# Altium PCB Control_Board_Model_C.PcbDoc (part 1 of 8)
Units mil, origin at the board's own origin, x right, y up, seen from the top; angles counter-clockwise.
Board outline 3417.32 x 2110.24 mil, 6 copper layers (1-SIG-TOP, 2-GND, 3-PWR, 4-SIG-HOR, 5-SIG-VERT, 6-GND-BOT), stack 46.063 mil thick; 420 components, 340 nets, 1596 pads, 39 vias.
Unrouted connection lines stored in the file: 362.
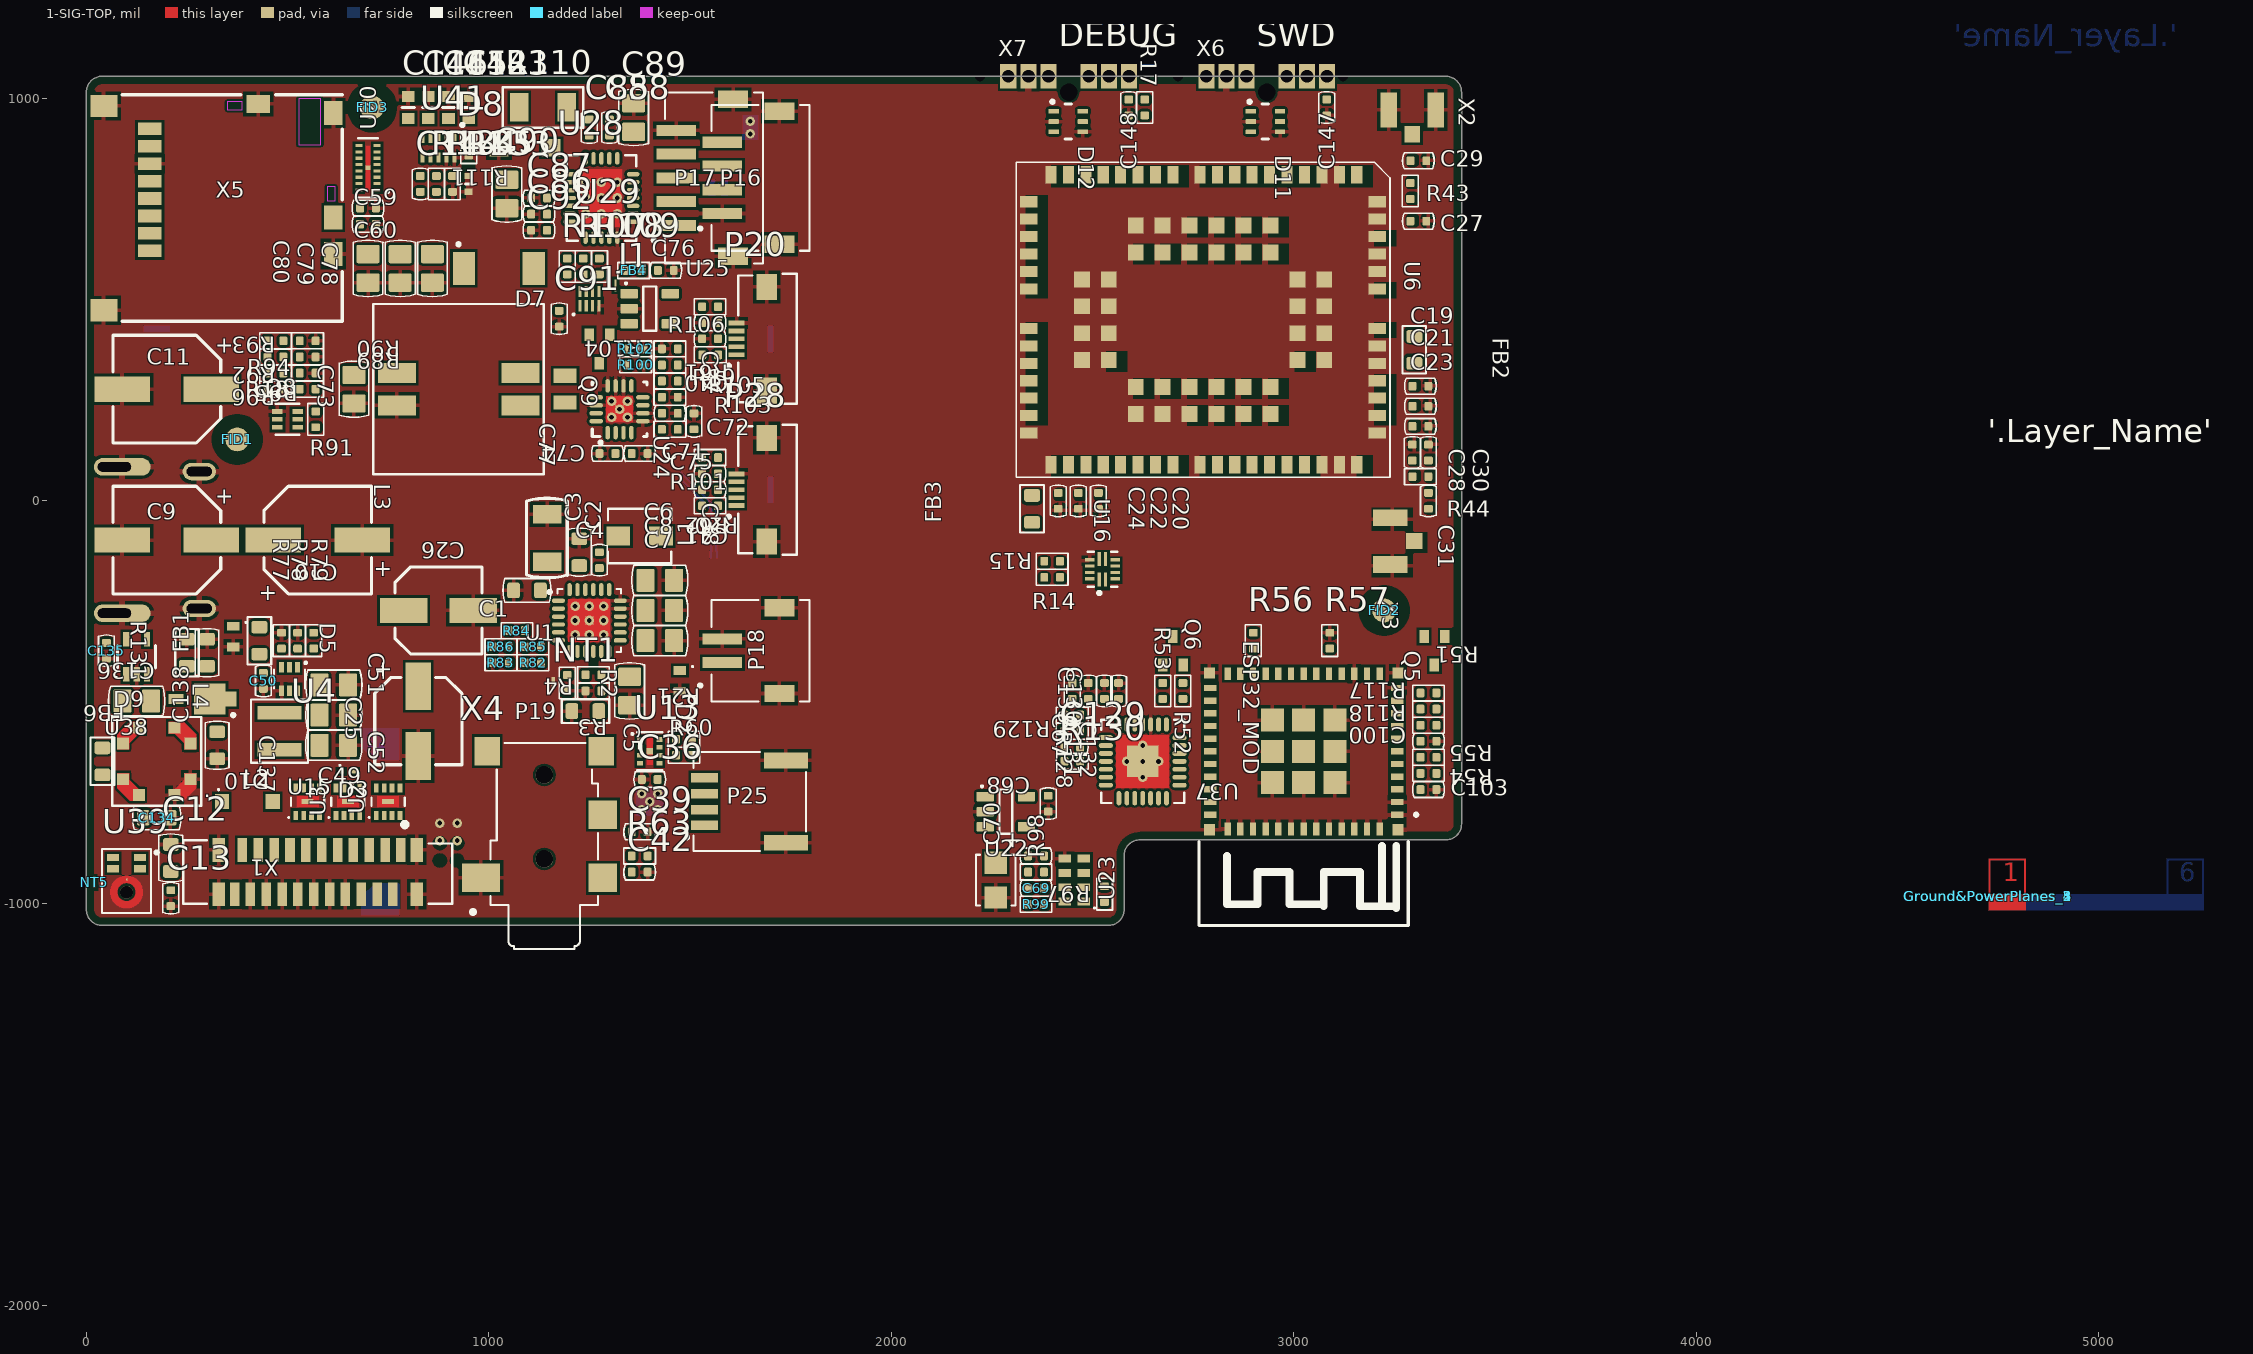
[diagram p0: 1-SIG-TOP view]
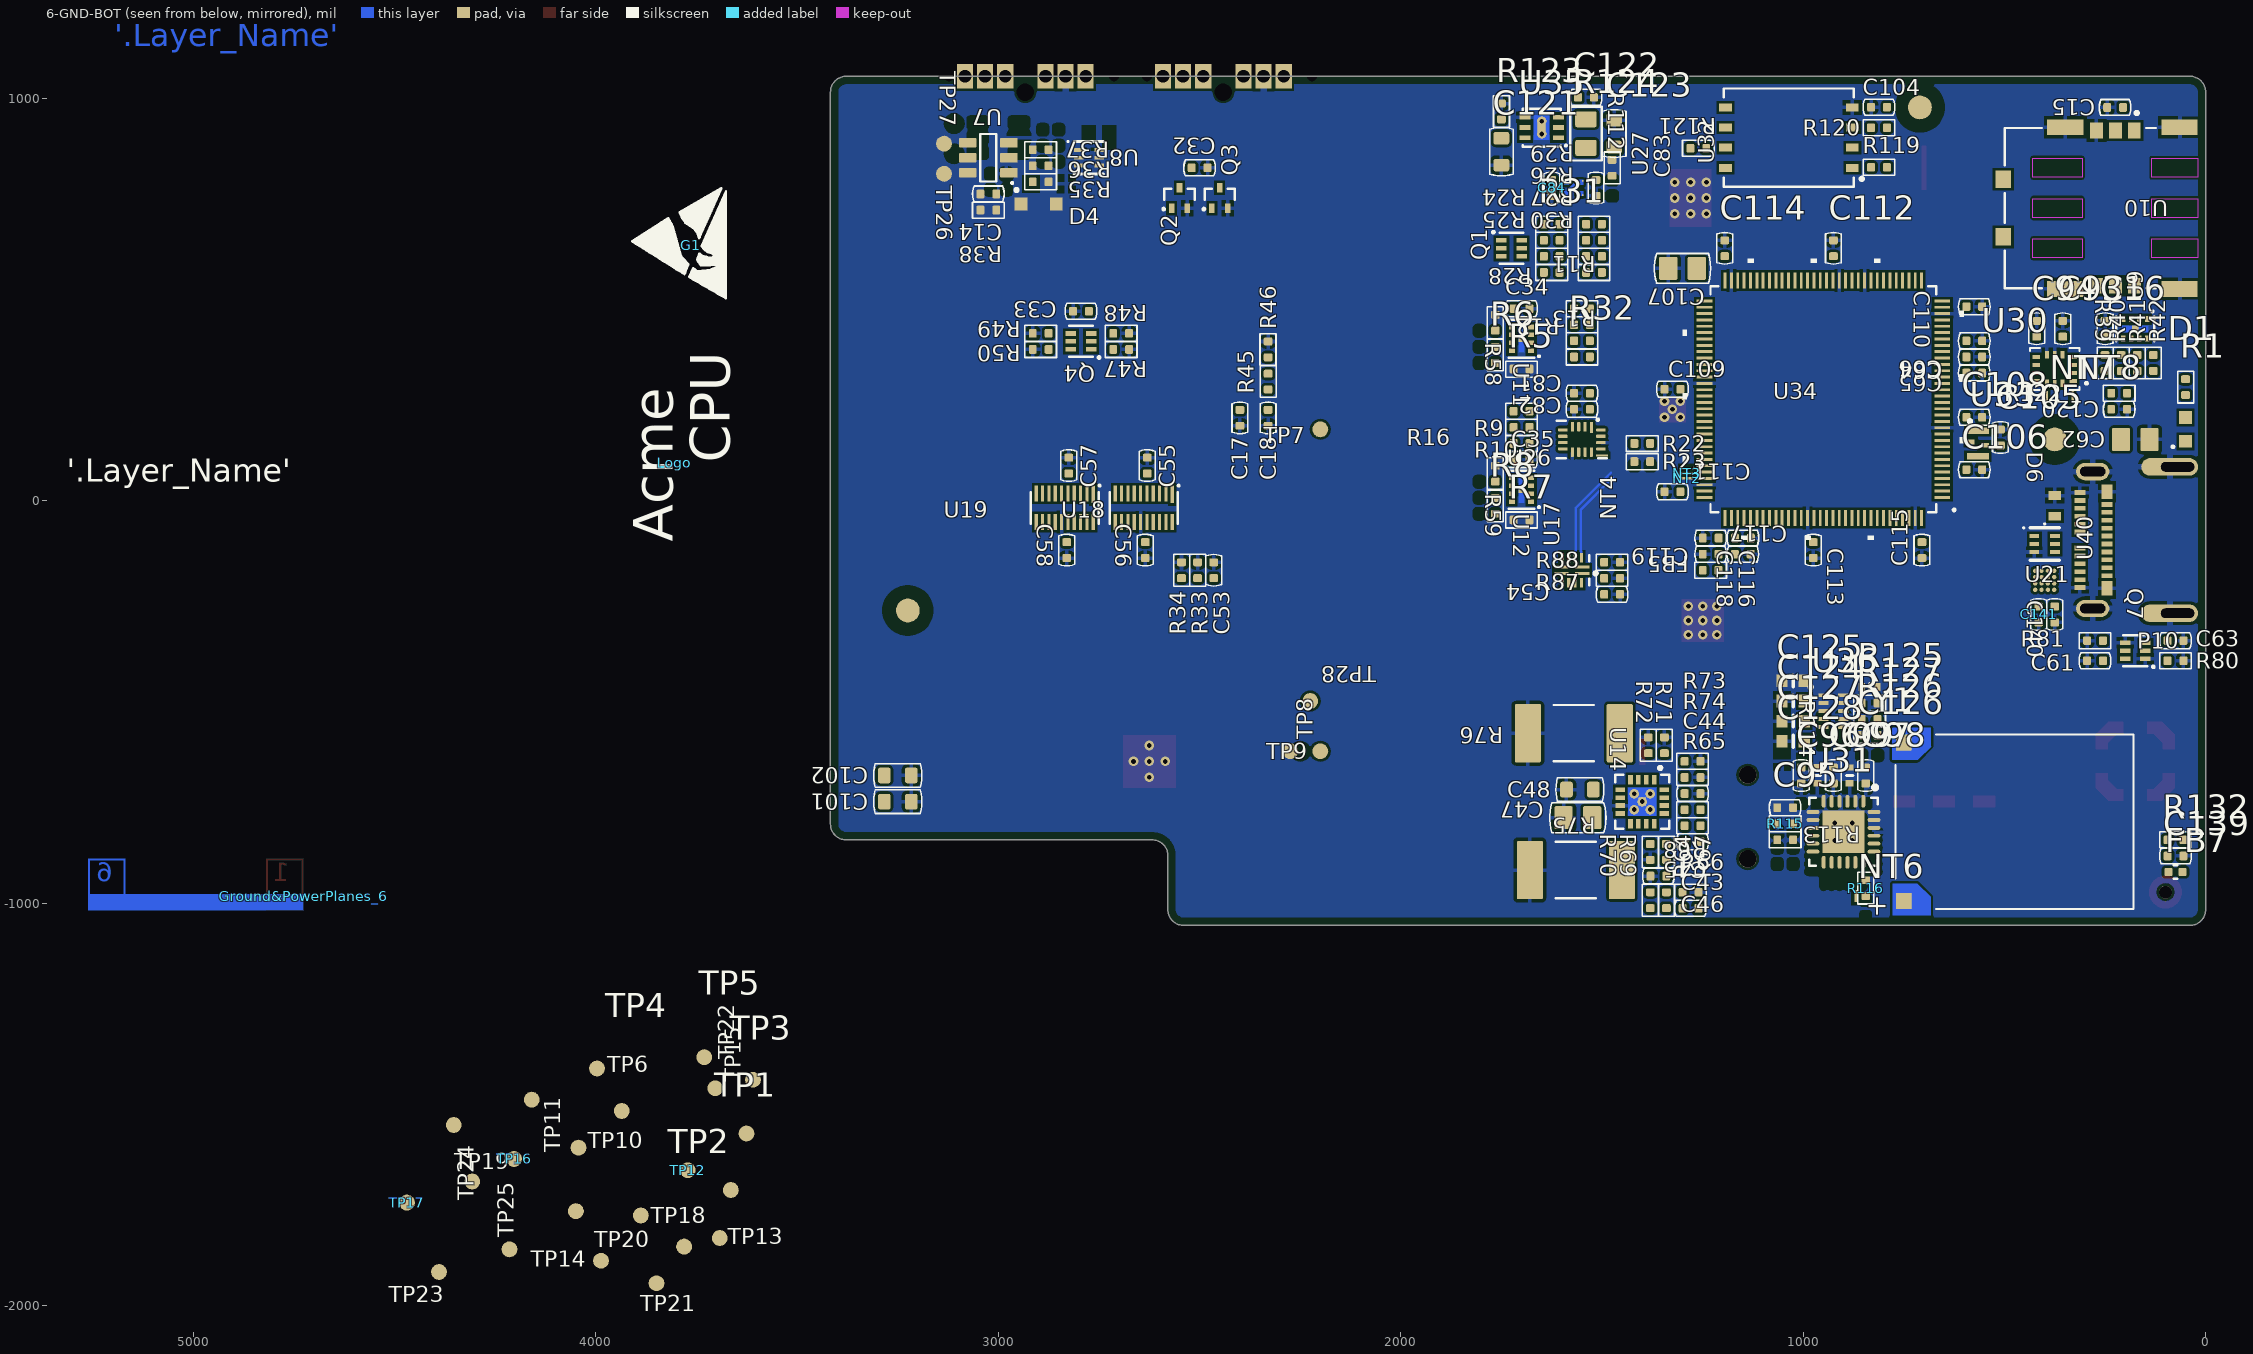
[diagram p1: 6-GND-BOT view, seen from below]
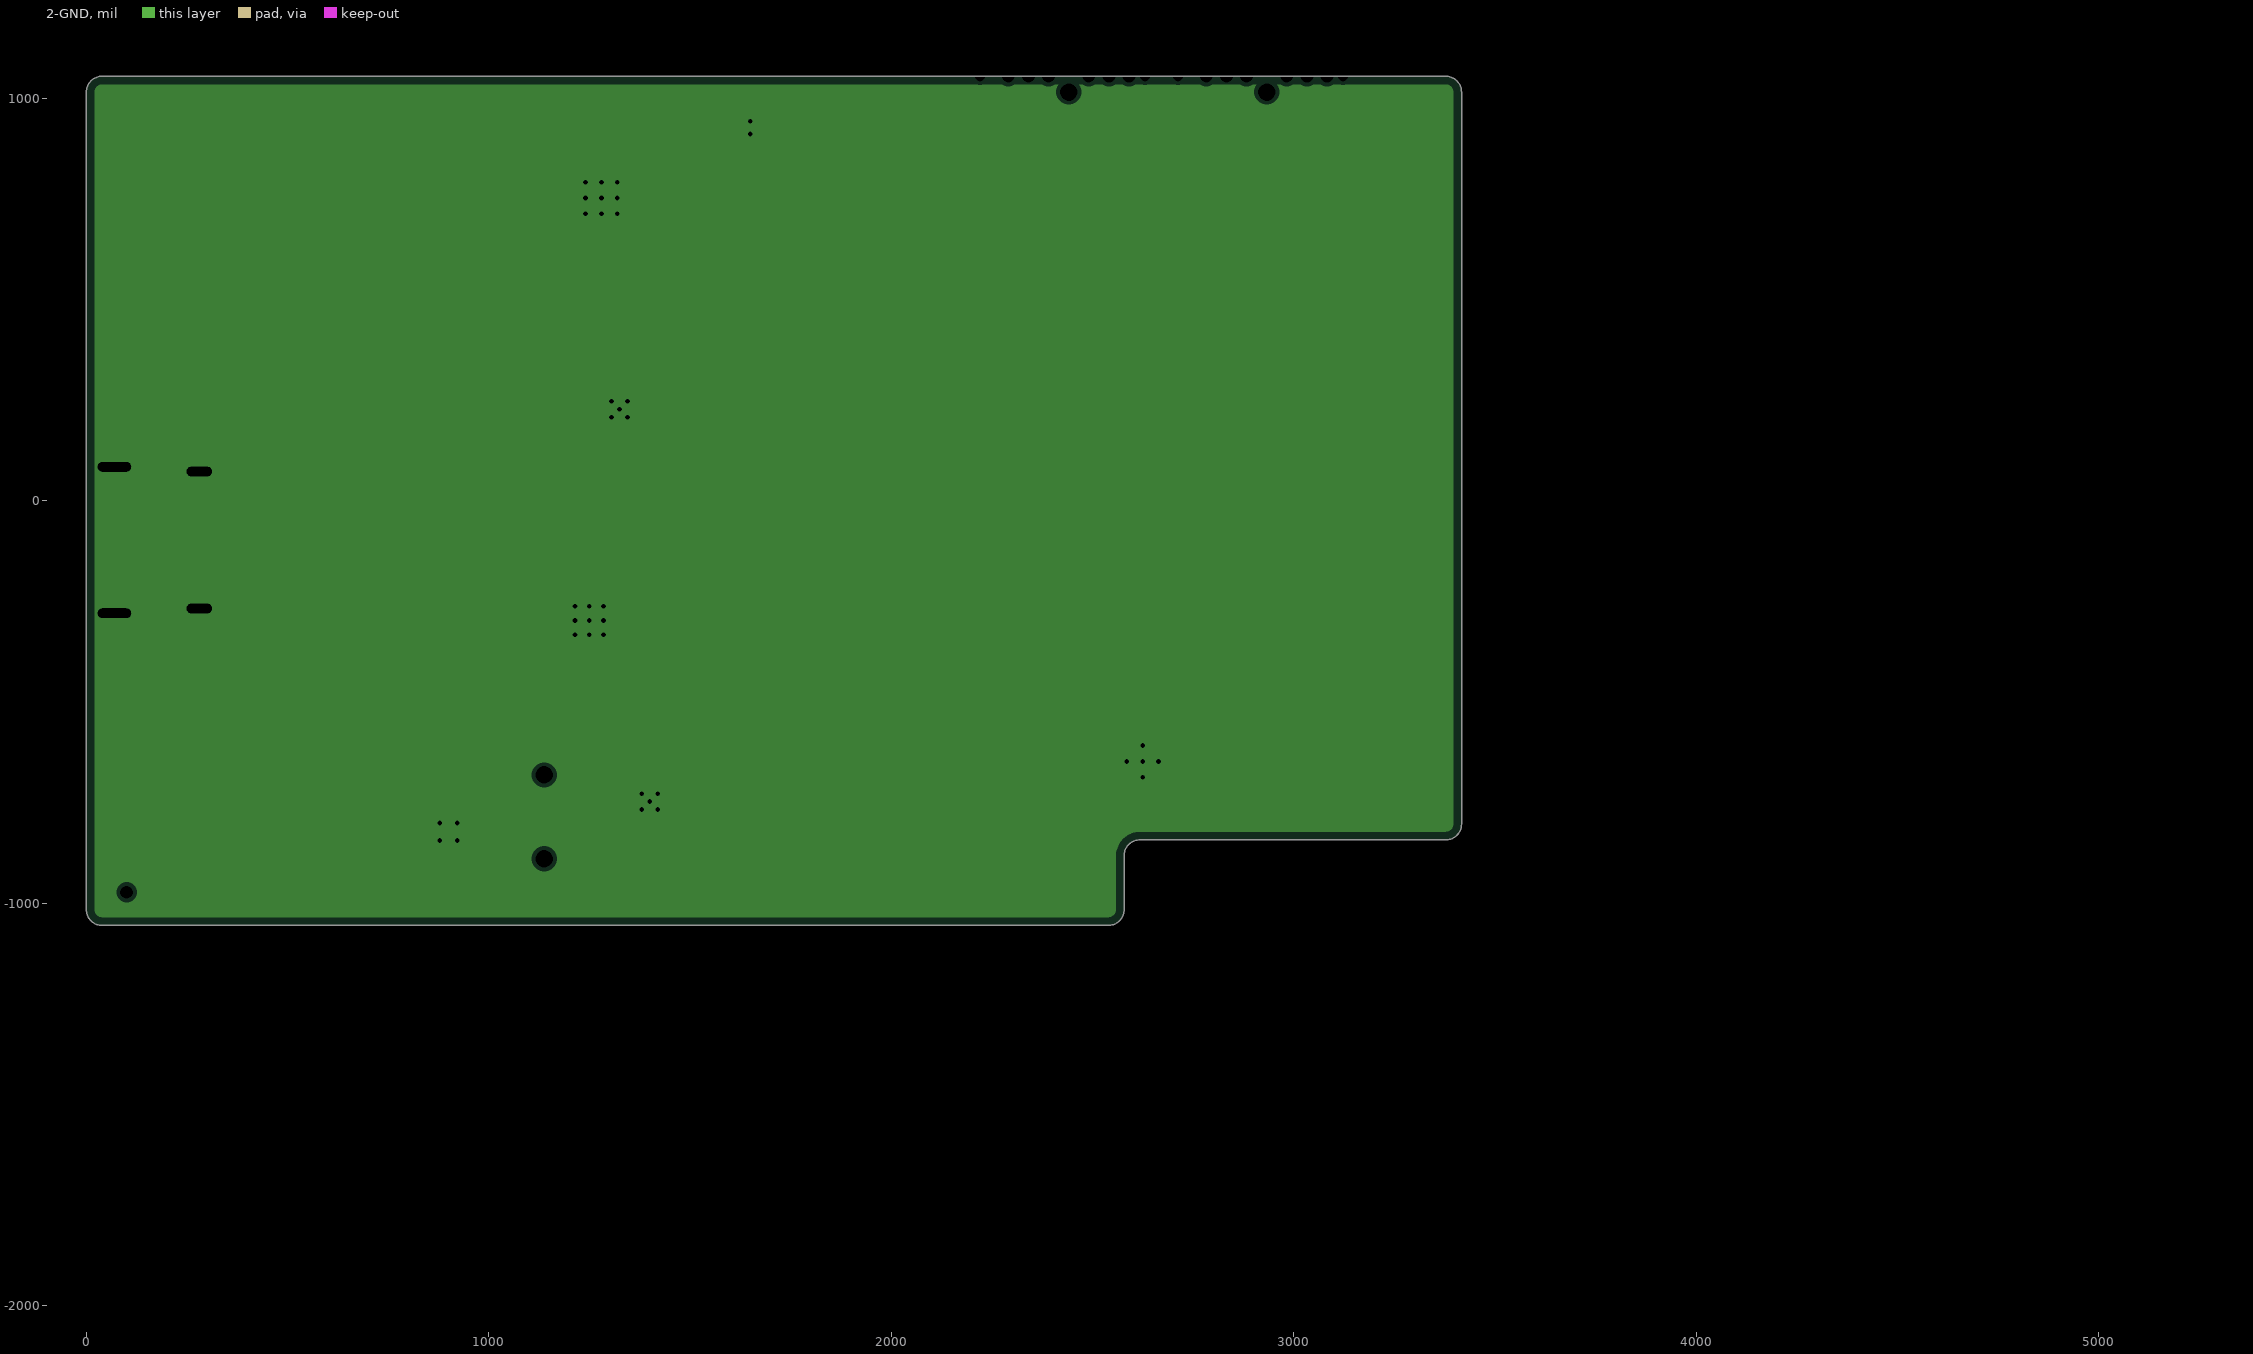
[diagram p2: 2-GND, clearances drawn from the general rule]
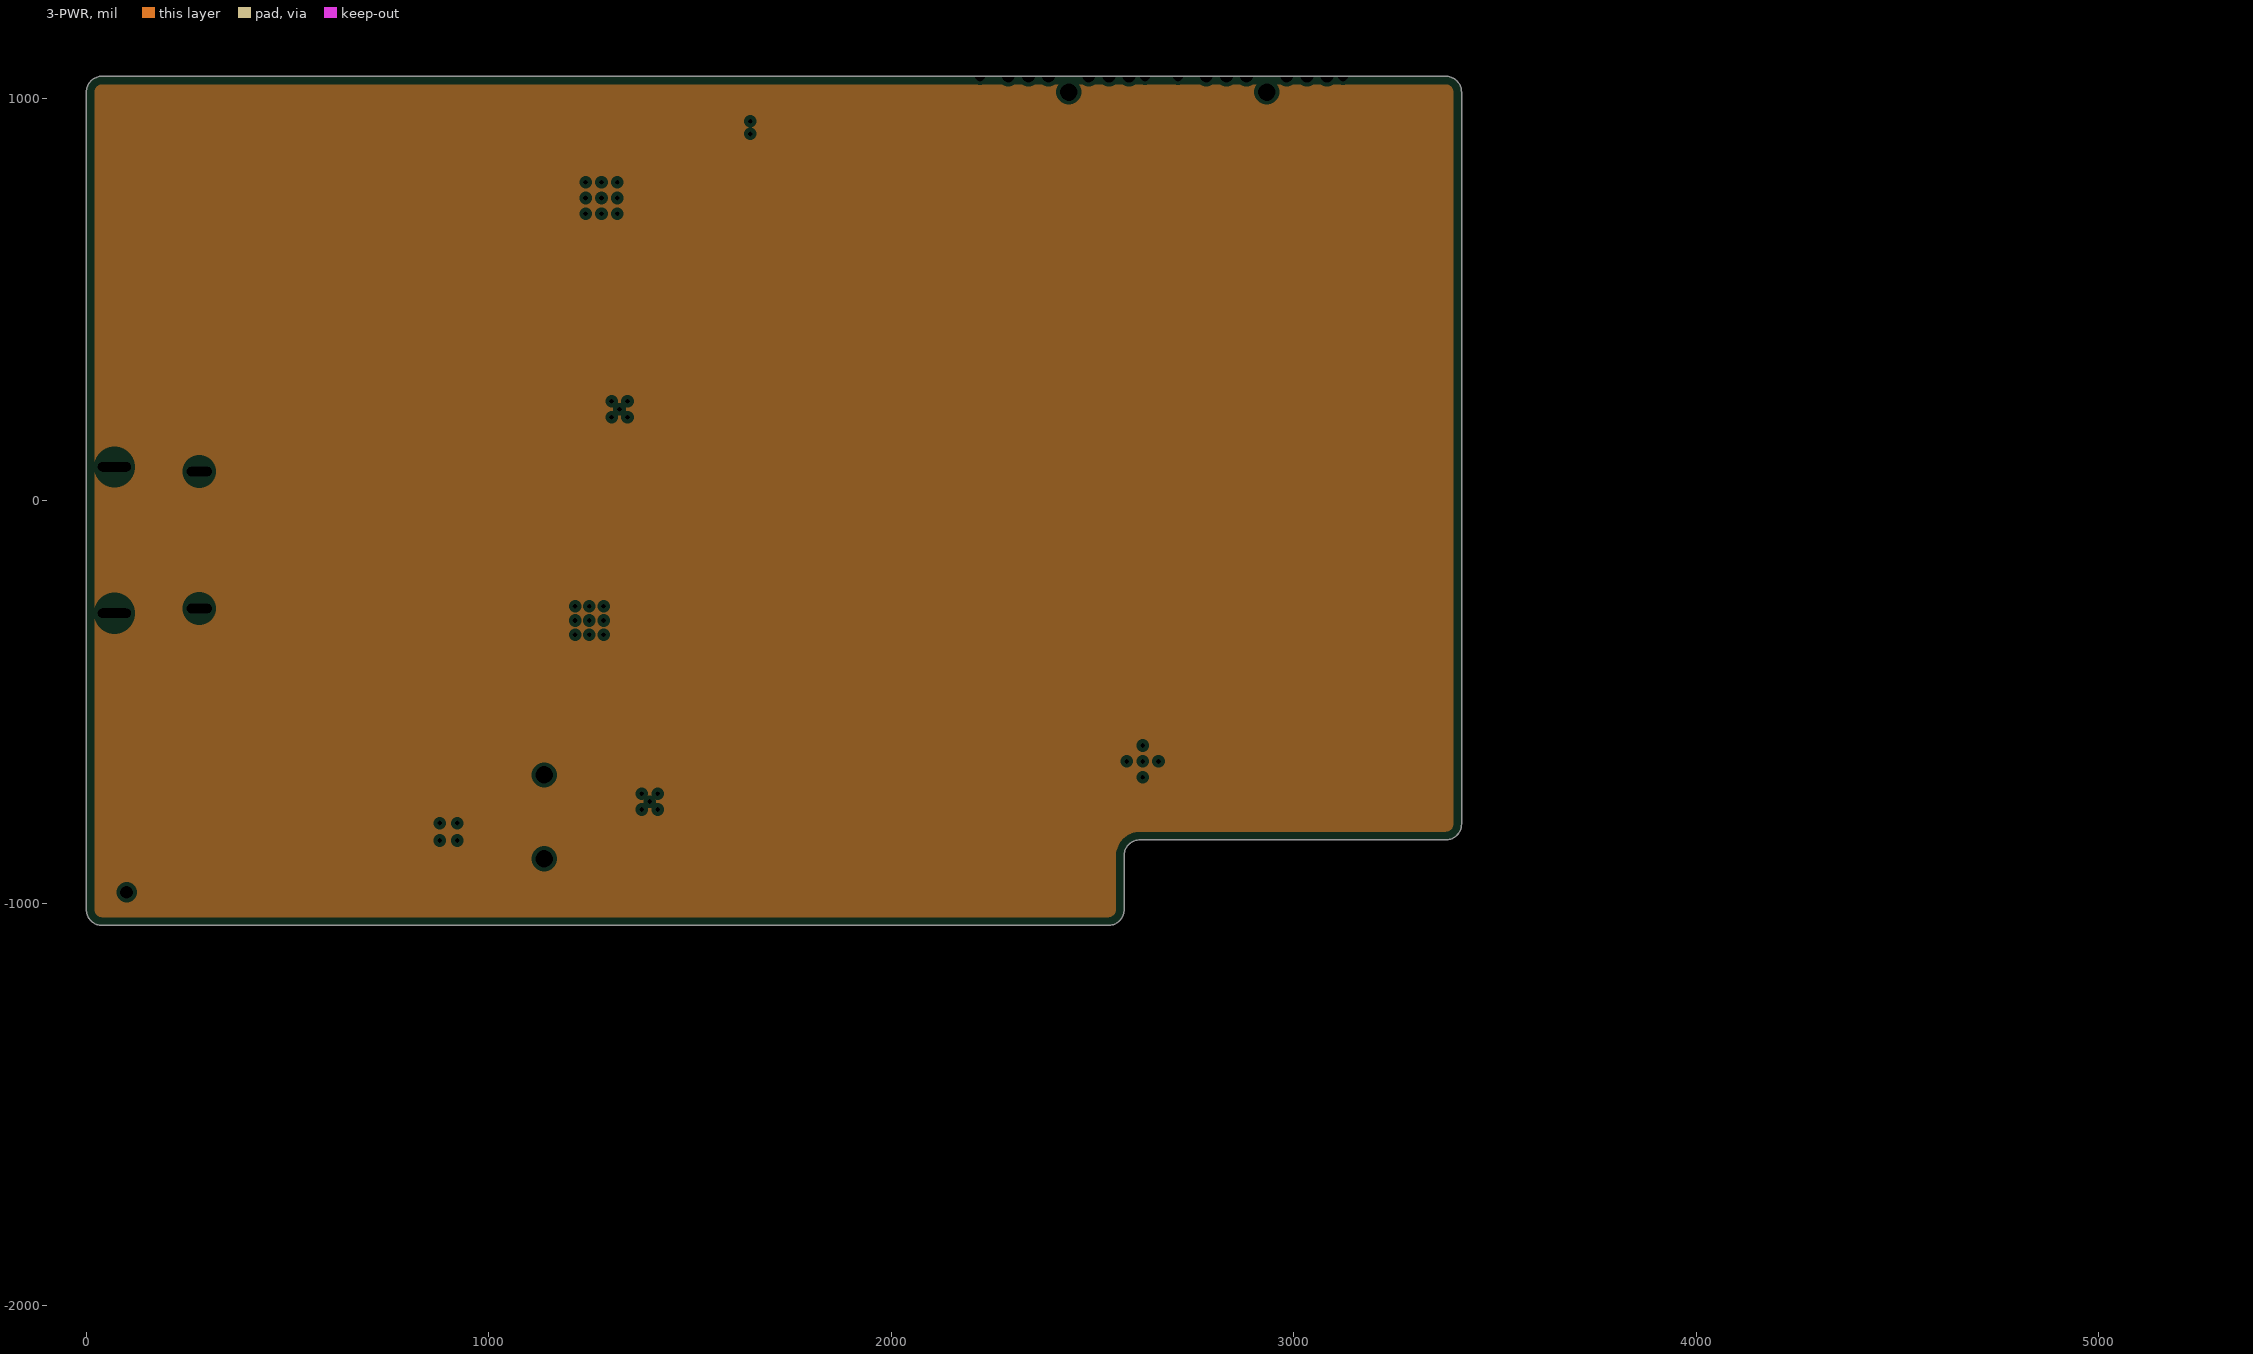
[diagram p3: 3-PWR, clearances drawn from the general rule]
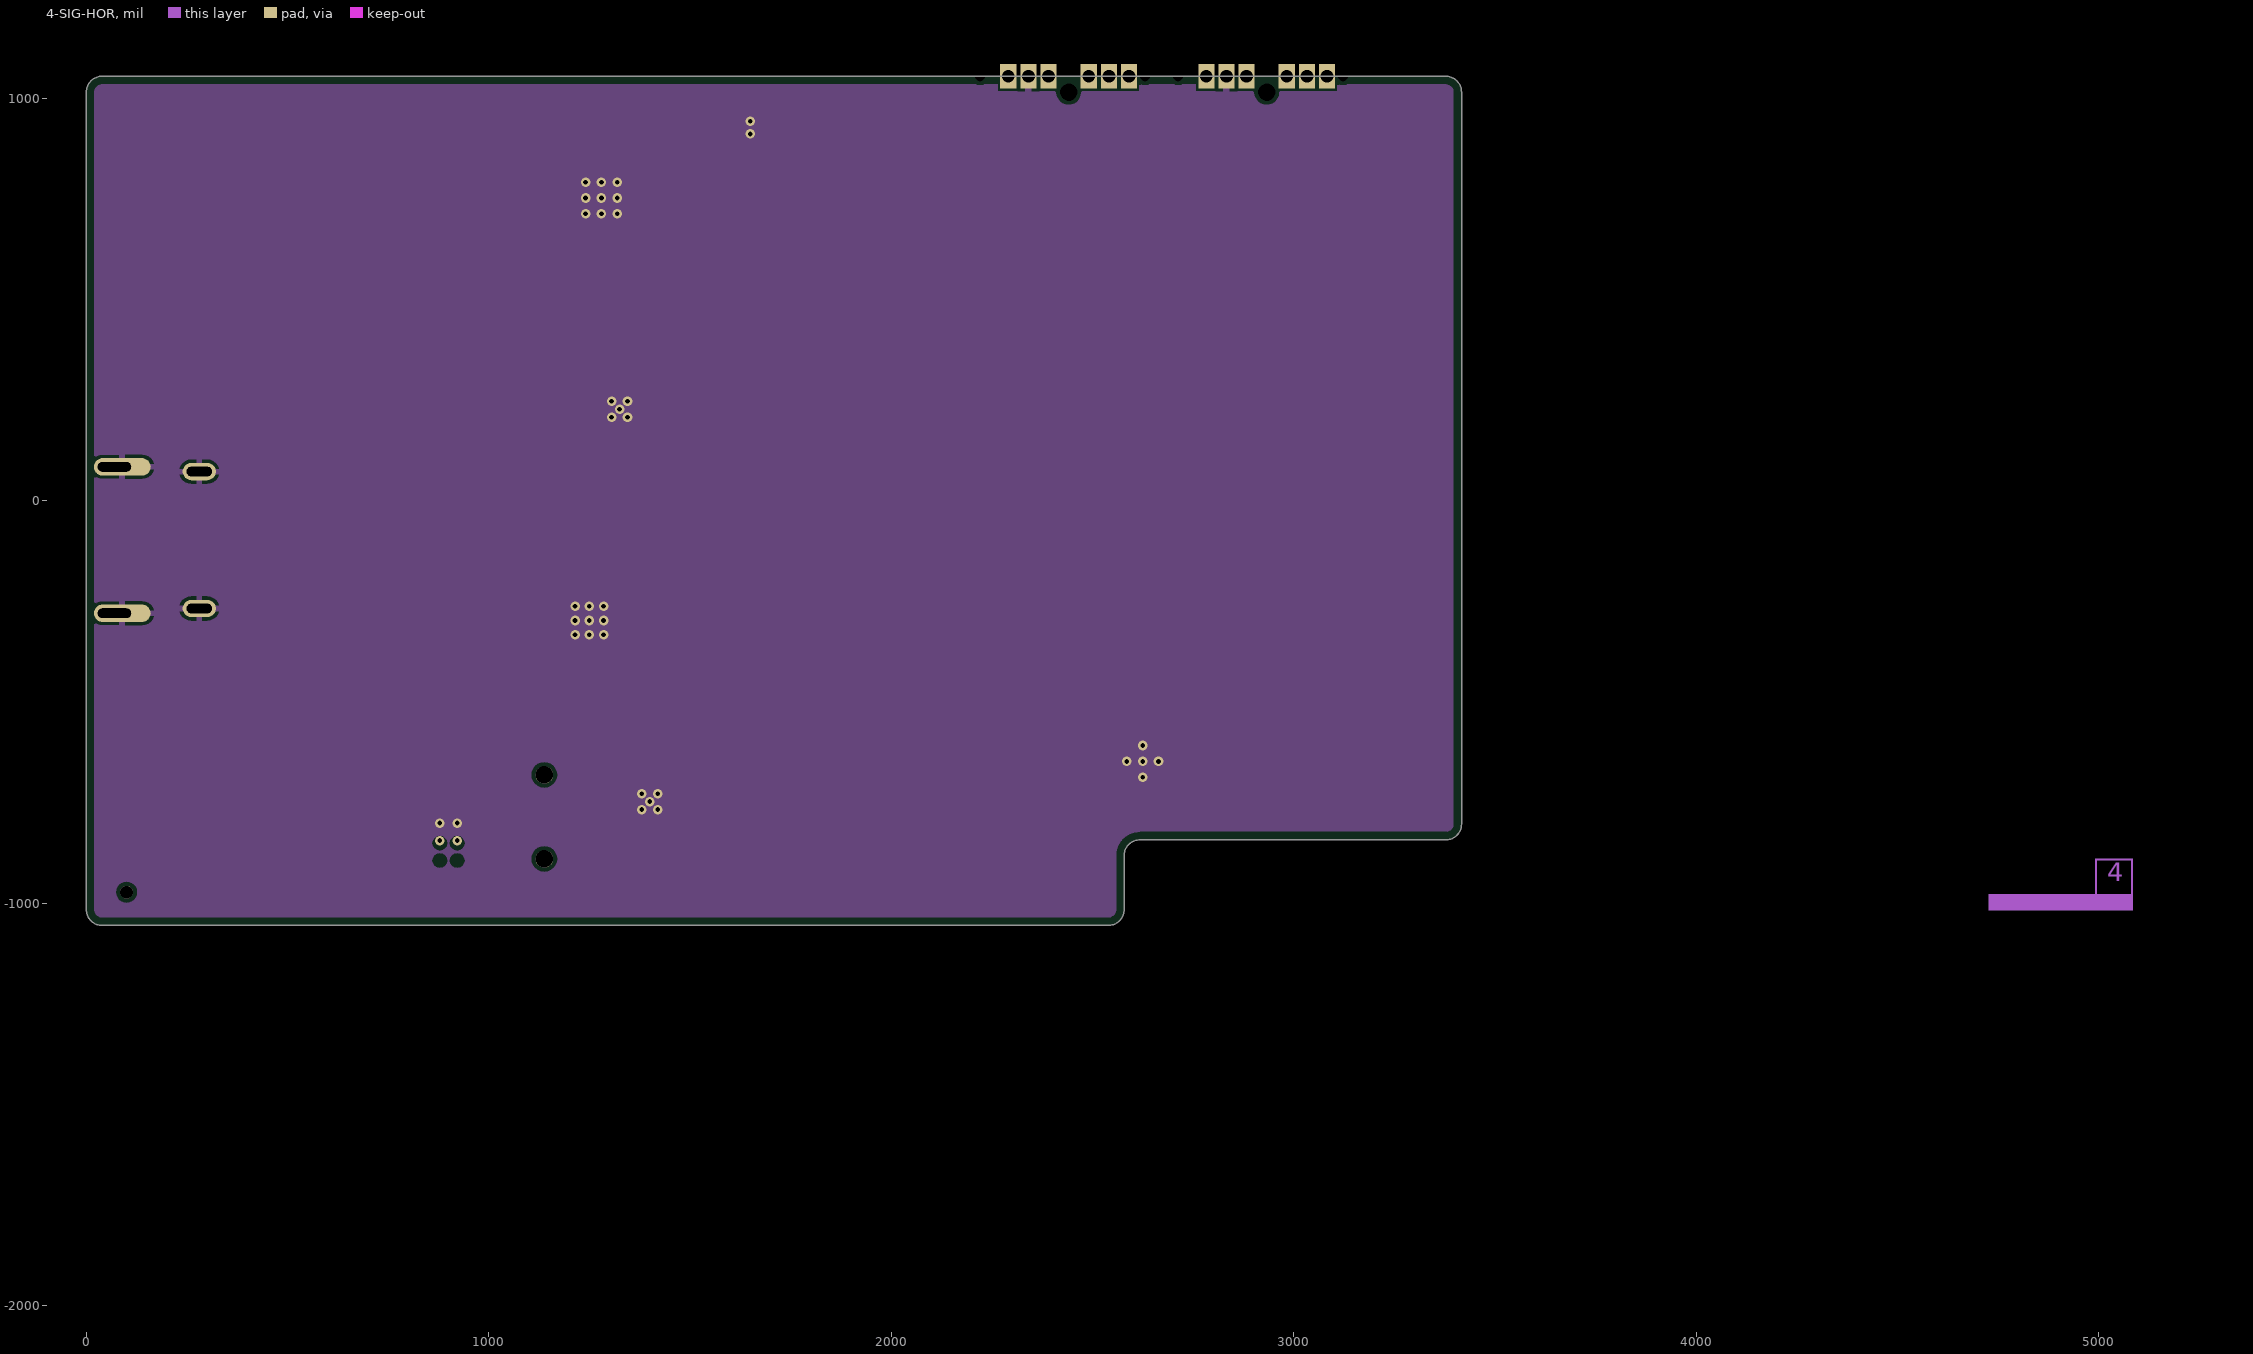
[diagram p4: 4-SIG-HOR]
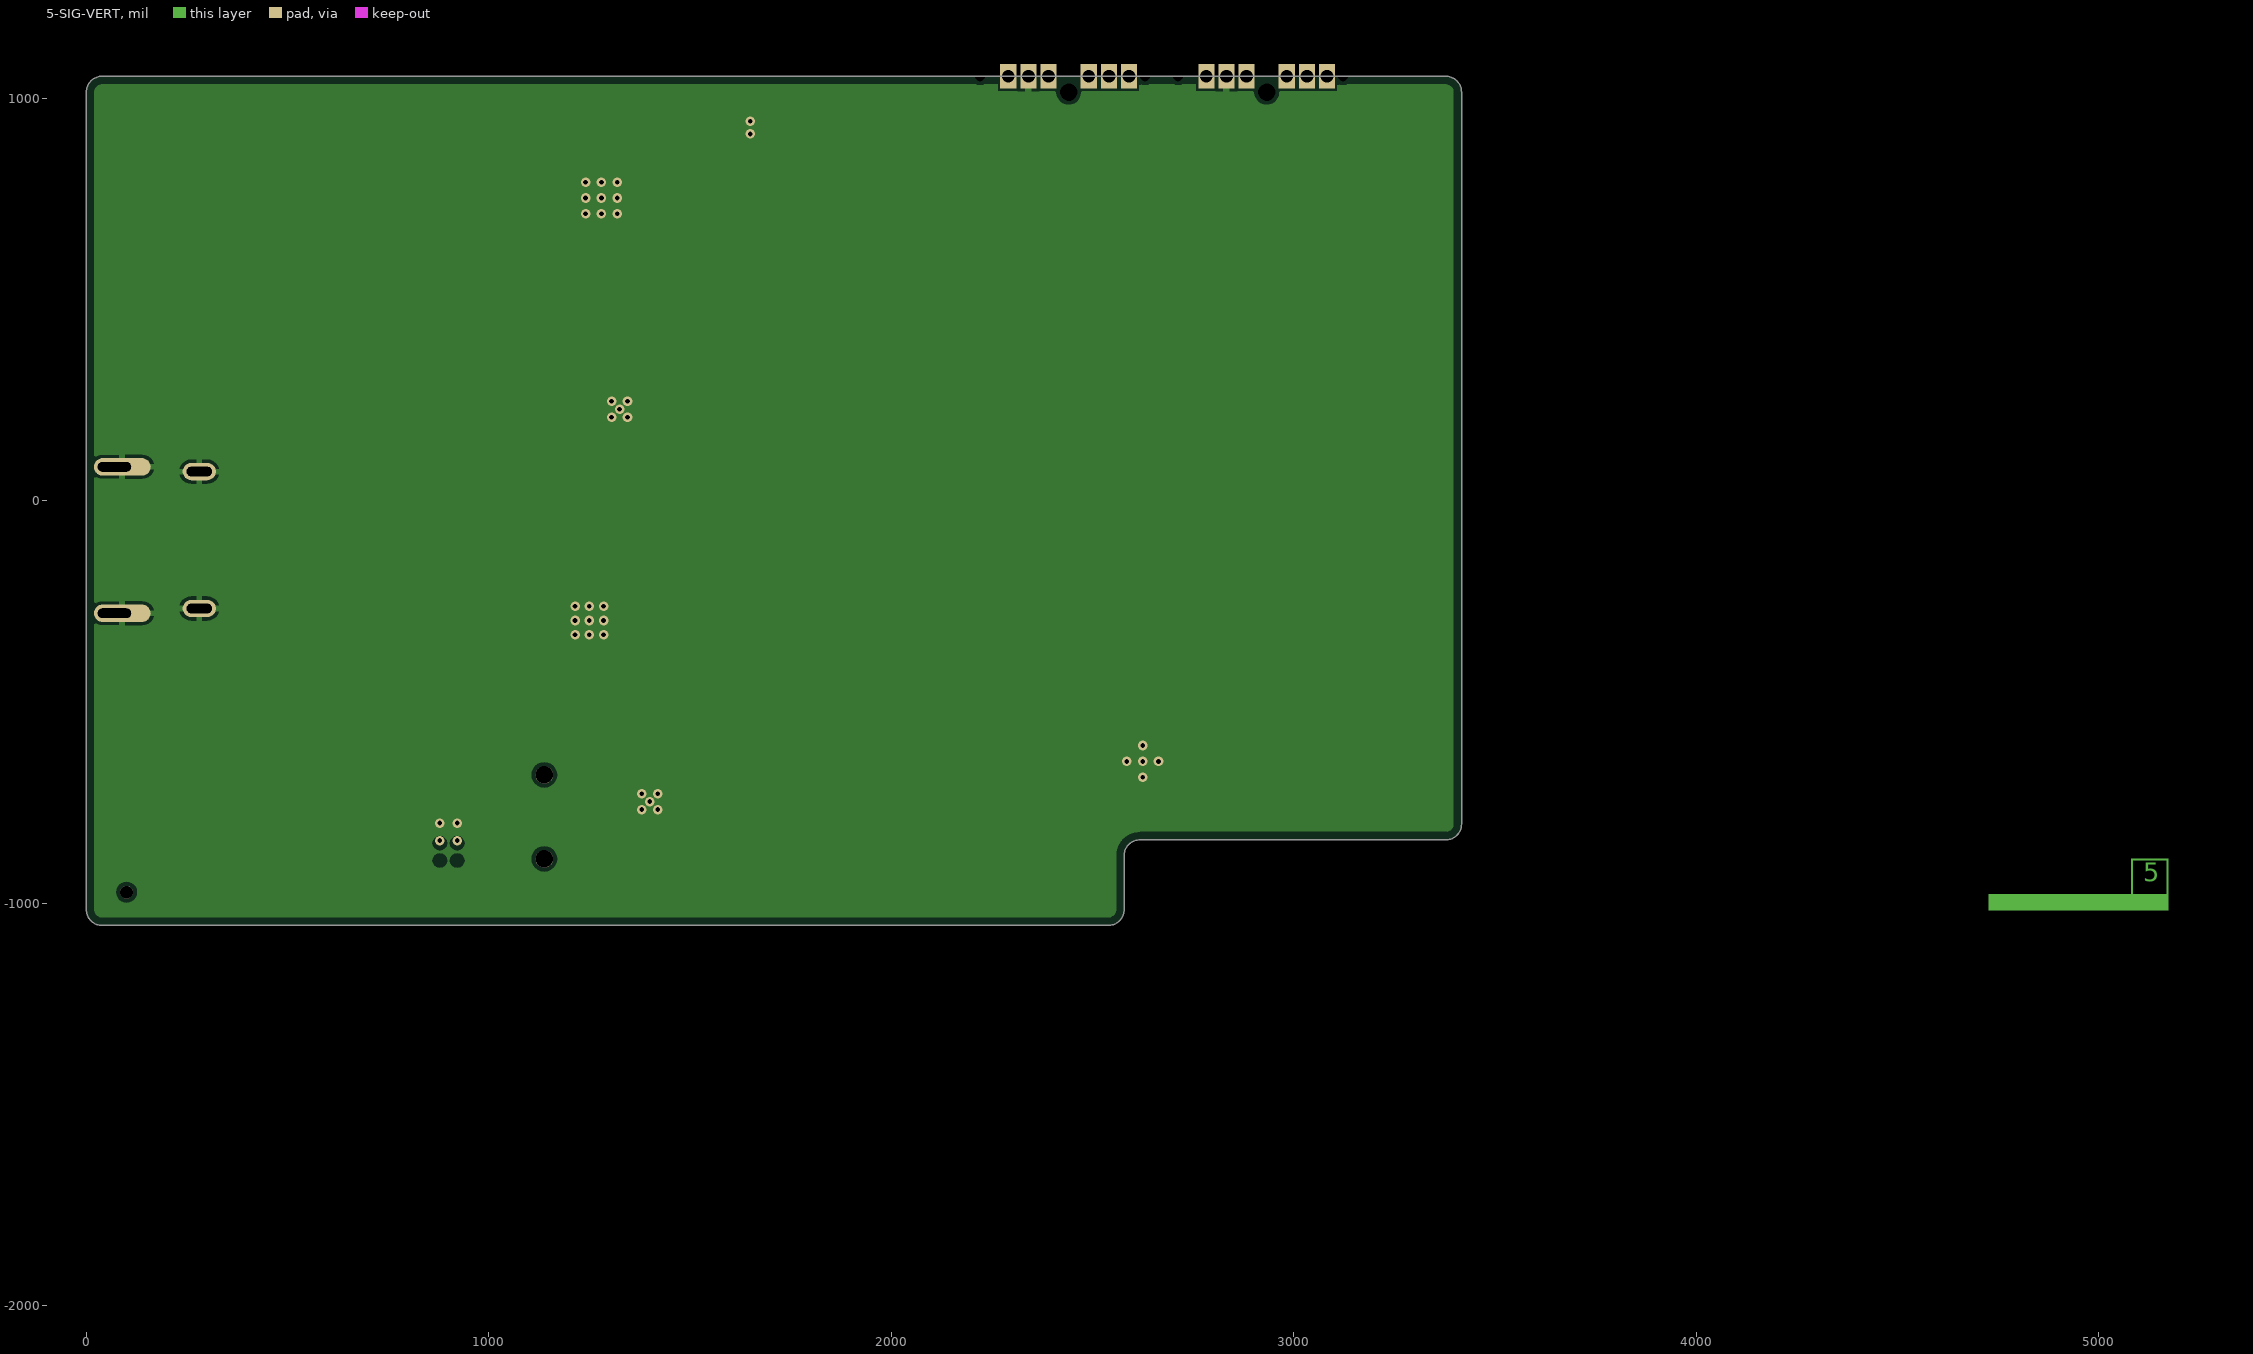
[diagram p5: 5-SIG-VERT]

## Layer stack, top to bottom
Top Solder: solder mask 0.787, Solder Resist, Dk 3.5
1-SIG-TOP: signal copper 1.378
Dielectric 1: prepreg 4.134, FR-4, Dk 4.29
2-GND: plane copper 1.378, net GND
Dielectric 3: core 11.811, FR-4, Dk 3.96
3-PWR: plane copper 1.378, net VSYS
Dielectric 2: prepreg 5.905, FR-4, Dk 4.29
4-SIG-HOR: signal copper 1.378
Dielectric 4: core 11.811, FR-4, Dk 3.96
5-SIG-VERT: signal copper 1.378
Dielectric 5: prepreg 4.134, FR-4, Dk 4.29
6-GND-BOT: signal copper 1.378
Bottom Solder: solder mask 0.787, Solder Resist, Dk 3.5

## Board outline
39.37,-1055.12 cw(c39.37,-1015.75) 0,-1015.75 0,1015.75 cw(c39.37,1015.75) 39.37,1055.12 3377.95,1055.12 cw(c3377.95,1015.75) 3417.32,1015.75 3417.32,-803.15 cw(c3377.95,-803.15) 3377.95,-842.52 2618.11,-842.52 ccw(c2618.11,-881.89) 2578.74,-881.89 2578.74,-1015.75 cw(c2539.37,-1015.75) 2539.37,-1055.12

## Design rules (kind name [scope] priority, off if disabled: settings)
BoardOutlineClearance BoardOutlineClearance_LayerStack [WithinRoom('PCB_Stackup')] p1: gap=0 ignorepadtopadclearanceinfootprint=FALSE
BoardOutlineClearance BoardOutlineClearance_LayerNames [WithinRoom('Layer_Names')] p2: gap=0 ignorepadtopadclearanceinfootprint=FALSE
BoardOutlineClearance BoardOutlineClearance_uSD_Slot [HasFootprintPad('5025700893','0')] p3: gap=0 ignorepadtopadclearanceinfootprint=FALSE
BoardOutlineClearance BoardOutlineClearance_USB-C_Conn [HasFootprintPad('MOLEX_2012670005','S3') or HasFootprintPad('MOLEX_2012670005','S4')] p4: gap=0 ignorepadtopadclearanceinfootprint=FALSE
BoardOutlineClearance BoardOutlineClearance_nanoSIM_Slot [HasFootprintPad('1042240820_MOL','G4') or HasFootprintPad('1042240820_MOL','G1') or ((ObjectKind = 'Fill') and HasFootprint('1042240820_MOL'))] p5: gap=0 ignorepadtopadclearanceinfootprint=FALSE
BoardOutlineClearance BoardOutlineClearance_Overlays [OnBottomSilkscreen or OnTopSilkscreen] p6: gap=0 ignorepadtopadclearanceinfootprint=FALSE
BoardOutlineClearance [All] p7: gap=19.68 ignorepadtopadclearanceinfootprint=FALSE
Clearance Clearance_InnerLayers [OnLayer('4-SIG-HOR') or OnLayer('5-SIG-VERT')] p1: gap=6 ignorepadtopadclearanceinfootprint=TRUE except(5.98: Arc-SMDPad Arc-THPad Arc-Via Track-SMDPad Track-THPad Track-Via THPad-THPad THPad-Via THPad-Fill THPad-Poly THPad-Region Via-Via Via-Fill Via-Poly Via-Region; 9.84: Arc-Hole Track-Hole SMDPad-Hole THPad-Hole Via-Hole Fill-Hole Poly-Hole Region-Hole Text-Hole)
Clearance [All] p2: gap=6 ignorepadtopadclearanceinfootprint=FALSE
ComponentClearance ComponentClearance_NetTie [HasFootprint('Net Tie 6x30mil')] p1: gap=0 collisioncheckmode=3 verticalgap=0 showdistances=FALSE
ComponentClearance ComponentClearance_PCB_Stackup [WithinRoom('PCB_Stackup')] p2: gap=0 collisioncheckmode=3 verticalgap=0 showdistances=FALSE
ComponentClearance ComponentClearance_Motor_Connectors [HasFootprint('CONN_JST_S5B-ZR-SM4A-TF(LF)(SN)') vs HasFootprint('CONN_JST_S4B-ZR-SM4A-TF(LF)(SN)')] p3: gap=0 collisioncheckmode=3 verticalgap=0 showdistances=FALSE
ComponentClearance [All] p4: gap=12 collisioncheckmode=3 verticalgap=40 showdistances=FALSE
DiffPairsRouting [All] p1: maxlimit=6 minlimit=6 mostfreqgap=6 toplayer_minwidth=6 toplayer_maxwidth=6 toplayer_prefwidth=6 midlayer1_minwidth=6 midlayer1_maxwidth=6 midlayer1_prefwidth=6 midlayer2_minwidth=6 midlayer2_maxwidth=6 midlayer2_prefwidth=6 bottomlayer_minwidth=6 bottomlayer_maxwidth=6 bottomlayer_prefwidth=6 maxuncoupledlength=500
HoleSize [All] p1: absolutevalues=TRUE maxlimit=248.03 minlimit=5.91 maxpercent=80.000 minpercent=20.000
HoleToHoleClearance [All] p1: gap=10 allowstackedmicrovias=FALSE
MatchedLengths MatchedLengths_QSPI [InNetClass('QSPI')] p1: tolerance=50 checknetsindiffpair=FALSE checkdiffpairvsdiffpair=TRUE checkxsignals=TRUE checkothers=TRUE
MinimumAnnularRing MinimumAnnularRing_Via_Int [IsVia and not (OnTopLayer or OnBottomLayer)] p1: minimumring=0
MinimumAnnularRing [All] p2: minimumring=6
MinimumSolderMaskSliver [All] p1: minsoldermaskwidth=3
PlaneClearance [All] p1: clearance=9.84
PlaneConnect PlaneConnect_Via [IsVia] p1: planeconnectstyle=Direct reliefexpansion=20 reliefentries=4 reliefconductorwidth=10 reliefairgap=10
PlaneConnect PlaneConnect_HeatTrap [All] p2: pad.planeconnectstyle=Relief pad.reliefexpansion=6 pad.reliefentries=4 pad.reliefconductorwidth=6 pad.reliefairgap=6 via.planeconnectstyle=Direct via.reliefexpansion=8 via.reliefentries=4 via.reliefconductorwidth=10 via.reliefairgap=10
PolygonConnect PolygonConnect_Via [IsVia] p1: connectstyle=Direct reliefconductorwidth=10 reliefentries=4 polygonreliefangle="90 Angle" airgapwidth=10
PolygonConnect PolygonConnect_TestPoints [InComponentClass('TestPoint')] p2: connectstyle=Direct reliefconductorwidth=10 reliefentries=4 polygonreliefangle="90 Angle" airgapwidth=10
PolygonConnect PolygonConnect_ThermPads [HasFootprintPad('DFN65P100X40-4N','5')] p3: connectstyle=Direct reliefconductorwidth=10 reliefentries=4 polygonreliefangle="90 Angle" airgapwidth=10
PolygonConnect PolygonConnect_BG95_GND [HasFootprint('BG95') and (InNet('GND') or InNetClass('BG95_PWR'))] p4: connectstyle=Direct reliefconductorwidth=10 reliefentries=4 polygonreliefangle="90 Angle" airgapwidth=10
PolygonConnect [All] p5: thpad.connectstyle=Relief thpad.reliefconductorwidth=15 thpad.reliefentries=4 thpad.polygonreliefangle="90 Angle" thpad.airgapwidth=8 smdpad.connectstyle=Relief smdpad.reliefconductorwidth=10 smdpad.reliefentries=4 smdpad.polygonreliefangle="90 Angle" smdpad.airgapwidth=8 via.connectstyle=Direct via.reliefconductorwidth=10 via.reliefentries=4 via.polygonreliefangle="90 Angle" via.airgapwidth=10
RoomDefinition PCB_Stackup [False] p1: confinementstyle=ConfineIn formatcopy=TRUE lockcomponents=FALSE outline 4700,-860 5305,-860 5305,-1045 4700,-1045
RoomDefinition +1V8_PS [InComponentClass('+1V8_PS')] p2: confinementstyle=ConfineIn formatcopy=TRUE lockcomponents=FALSE outline 1650,727.56 1450,727.56 1450,827.56 1650,827.56
RoomDefinition P26 [InComponentClass('P26')] p3: confinementstyle=ConfineIn formatcopy=TRUE lockcomponents=FALSE outline 2550,-1022.44 2550,-847.44 2200,-847.44 2200,-1022.44
RoomDefinition +3V3_PS [InComponentClass('+3V3_PS')] p4: confinementstyle=ConfineIn formatcopy=TRUE lockcomponents=FALSE outline 975,752.56 975,1027.56 775,1027.56 775,752.56
RoomDefinition +3V3_AUDIO_PS [InComponentClass('+3V3_AUDIO_PS')] p5: confinementstyle=ConfineIn formatcopy=TRUE lockcomponents=FALSE outline 800,-422.44 1075,-422.44 1075,-622.44 800,-622.44
RoomDefinition +1V8_VLT1 [InComponentClass('+1V8_VLT1')] p6: confinementstyle=ConfineIn formatcopy=TRUE lockcomponents=FALSE outline 2925,-162.44 2745,-162.44 2745,127.56 2925,127.56
RoomDefinition +1V8_VLT2 [InComponentClass('+1V8_VLT2')] p7: confinementstyle=ConfineIn formatcopy=TRUE lockcomponents=FALSE outline 2730,-162.44 2550,-162.44 2550,127.56 2730,127.56
RoomDefinition "U_TPS22810 2" [InComponentClass('U_TPS22810 2')] p8: confinementstyle=ConfineIn formatcopy=TRUE lockcomponents=FALSE outline 1450,1027.56 1800,1027.56 1800,802.56 1450,802.56
RoomDefinition RTC_XTAL [InComponentClass('RTC_XTAL')] p9: confinementstyle=ConfineIn formatcopy=TRUE lockcomponents=FALSE outline 490,87.56 615,87.56 615,212.56 490,212.56
RoomDefinition CODEC [InComponentClass('CODEC')] p10: confinementstyle=ConfineIn formatcopy=TRUE lockcomponents=FALSE outline 800,-622.44 1075,-622.44 1075,-947.44 800,-947.44
RoomDefinition P128 [InComponentClass('P128')] p11: confinementstyle=ConfineIn formatcopy=TRUE lockcomponents=FALSE outline 300,227.56 300,477.56 450,477.56 450,227.56
RoomDefinition P01 [InComponentClass('P01')] p12: confinementstyle=ConfineIn formatcopy=TRUE lockcomponents=FALSE outline 2677.17,874.02 3169.29,874.02 3169.29,1102.36 2677.17,1102.36
RoomDefinition STM32G473QETx [InComponentClass('STM32G473QETx')] p13: confinementstyle=ConfineIn formatcopy=TRUE lockcomponents=FALSE outline 1450,-262.44 505,-262.44 505,652.56 1450,652.56
RoomDefinition "U_DRV10975 3-ph Sensorless BLDC Motor Driver" [InComponentClass('U_DRV10975 3-ph Sensorless BLDC Motor Driver')] p14: confinementstyle=ConfineIn formatcopy=TRUE lockcomponents=FALSE outline 1400,1027.56 1000,1027.56 1000,577.56 1400,577.56
RoomDefinition P02 [InComponentClass('P02')] p15: confinementstyle=ConfineIn formatcopy=TRUE lockcomponents=FALSE outline 2185.04,874.02 2677.17,874.02 2677.17,1102.36 2185.04,1102.36
RoomDefinition MIC1 [InComponentClass('MIC1')] p16: confinementstyle=ConfineIn formatcopy=TRUE lockcomponents=FALSE outline 0,-1047.44 225,-1047.44 225,-797.44 0,-797.44
RoomDefinition USB-to-UART_Bridge [InComponentClass('USB-to-UART_Bridge')] p17: confinementstyle=ConfineIn formatcopy=TRUE lockcomponents=FALSE outline 2750,-422.44 2400,-422.44 2400,-772.44 2750,-772.44
RoomDefinition FLASH [InComponentClass('FLASH')] p18: confinementstyle=ConfineIn formatcopy=TRUE lockcomponents=FALSE outline 772.44,777.56 772.44,1027.56 1300,1027.56 1300,777.56
RoomDefinition P105 [InComponentClass('P105')] p19: confinementstyle=ConfineIn formatcopy=TRUE lockcomponents=FALSE outline 2200,-847.44 2200,-697.44 2425,-697.44 2425,-847.44
RoomDefinition DISP_PS [InComponentClass('DISP_PS')] p20: confinementstyle=ConfineIn formatcopy=TRUE lockcomponents=FALSE outline 400,-297.44 0,-297.44 0,-817.44 400,-817.44
RoomDefinition P110 [InComponentClass('P110')] p21: confinementstyle=ConfineIn formatcopy=TRUE lockcomponents=FALSE outline 1750,-472.44 1750,-1047.44 1225,-1047.44 1225,-472.44
RoomDefinition P103 [InComponentClass('P103')] p22: confinementstyle=ConfineIn formatcopy=TRUE lockcomponents=FALSE outline 625,602.56 625,2.56 1550,2.56 1550,602.56
RoomDefinition P109 [InComponentClass('P109')] p23: confinementstyle=ConfineIn formatcopy=TRUE lockcomponents=FALSE outline 2300,1052.56 2300,-222.44 3400,-222.44 3400,1052.56
RoomDefinition +4V2_PS [InComponentClass('+4V2_PS')] p24: confinementstyle=ConfineIn formatcopy=TRUE lockcomponents=FALSE outline 400,-297.44 400,-647.44 700,-647.44 700,-297.44
RoutingVias [All] p1: holewidth=5.91 width=19.68 viastyle="Through Hole" minholewidth=5.91 minwidth=19.68 maxholewidth=19.68 maxwidth=27.56
SilkToSilkClearance [All] p1: silktosilkclearance=1
SilkToSolderMaskClearance [IsPad] p1: minsilkscreentomaskgap=4 clearancetoexposedcopper=FALSE
SolderMaskExpansion [All] p1: expansion=2
Width "Schematic Width Constraint_4" [InNet('NetC31_2')] p1: maxlimit=44.61 minlimit=4.02 preferedwidth=38.03 toplayer_maxwidth=6.06 toplayer_prefwidth=4.96 midlayer1_minwidth=7.01 midlayer1_maxwidth=10 midlayer1_prefwidth=8.43 midlayer2_minwidth=24.72 midlayer2_maxwidth=34.21 midlayer2_prefwidth=29.13 bottomlayer_minwidth=32.36 impedancedriven=TRUE minimp=45.000000 maximp=55.000000 favimp=50.000000
Width "Schematic Width Constraint_3" [InNet('NetC30_2')] p2: maxlimit=44.61 minlimit=4.02 preferedwidth=38.03 toplayer_maxwidth=6.06 toplayer_prefwidth=4.96 midlayer1_minwidth=7.01 midlayer1_maxwidth=10 midlayer1_prefwidth=8.43 midlayer2_minwidth=24.72 midlayer2_maxwidth=34.21 midlayer2_prefwidth=29.13 bottomlayer_minwidth=32.36 impedancedriven=TRUE minimp=45.000000 maximp=55.000000 favimp=50.000000
Width "Schematic Width Constraint_2" [InNet('NetC29_2')] p3: maxlimit=44.61 minlimit=4.02 preferedwidth=38.03 toplayer_maxwidth=6.06 toplayer_prefwidth=4.96 midlayer1_minwidth=7.01 midlayer1_maxwidth=10 midlayer1_prefwidth=8.43 midlayer2_minwidth=24.72 midlayer2_maxwidth=34.21 midlayer2_prefwidth=29.13 bottomlayer_minwidth=32.36 impedancedriven=TRUE minimp=45.000000 maximp=55.000000 favimp=50.000000
Width "Schematic Width Constraint_1" [InNet('NetC28_2')] p4: maxlimit=44.61 minlimit=4.02 preferedwidth=38.03 toplayer_maxwidth=6.06 toplayer_prefwidth=4.96 midlayer1_minwidth=7.01 midlayer1_maxwidth=10 midlayer1_prefwidth=8.43 midlayer2_minwidth=24.72 midlayer2_maxwidth=34.21 midlayer2_prefwidth=29.13 bottomlayer_minwidth=32.36 impedancedriven=TRUE minimp=45.000000 maximp=55.000000 favimp=50.000000
Width "Schematic Width Constraint" [InNet('NetC27_2')] p5: maxlimit=44.61 minlimit=4.02 preferedwidth=38.03 toplayer_maxwidth=6.06 toplayer_prefwidth=4.96 midlayer1_minwidth=7.01 midlayer1_maxwidth=10 midlayer1_prefwidth=8.43 midlayer2_minwidth=24.72 midlayer2_maxwidth=34.21 midlayer2_prefwidth=29.13 bottomlayer_minwidth=32.36 impedancedriven=TRUE minimp=45.000000 maximp=55.000000 favimp=50.000000
Width [All] p6: maxlimit=200 minlimit=6 preferedwidth=10
21 further rules are at their usual default settings.

## Classes and differential pairs
channel class EC06-IDC_6-pin_Castellated_Board-Edge_Connector: P01 P02
component class FLASH: C104 R117 R118 R121 U32
component class DISP_PS: C134 C135 C136 C137 C138 D9 D10 FB6 L4 R131 U38
channel class TPSM82822_2A_Buck_Module: +3V3_AUDIO_PS +3V3_PS
component class P128: C93 C94 NT7 NT8 U30
component class +3V3_AUDIO_PS: C124 C125 C126 C127 C128 R125 R126 R127 U36
component class "U_TPS22810 2": C121 C122 C123 R121 R124 U35
component class P103: C71 C72 C73 C74 C75 C76 C77 C78 C79 C80 D7 FB4 L3 Q9 R97 R100 R102 R103 R104 R105 R106 U24 U25
component class STM32G473CETx: C64 C65 C66 NT2 NT3 Q8 R9 R10 R21 R22 R89 R90 R91 R92 R93 R94 R95 R96
net class PG[0..9]: PG0 PG1 PG2 PG3 PG4 PG5 PG6 PG7 PG8 PG9
net class PF[0..15]: PF0 PF1 PF2 PF3 PF4 PF6 PF7 PF14 PF15
net class PE[0..15]: PE0 PE1 PE2 PE3 PE4 PE5 PE6 PE7 PE8 PE9 PE10 PE11 PE12 PE13 PE14 PE15
net class PD[0..15]: PD0 PD1 PD2 PD7 PD8 PD9 PD10 PD12 PD13 PD14 PD15
component class STM32G473QETx: C106 C107 C108 C109 C110 C111 C112 C113 C114 C115 C116 C117 C118 C119 C120 FB5 R118 U34
component class RTC_XTAL: C105 U33
component class MIC1: C139 FB7 R130 U39
component class MCU: C105 U33
component class I2C_SW: R5 R6 R7 R8
net class BG95_PWR: NetC19_1 NetC20_1 NetC20_2
component class TCPP: C61 C63 Q7 R78 R81
component class "U_DRV10975 3-ph Sensorless BLDC Motor Driver": C85 C86 C87 C88 C89 C90 D8 J1 R107 R108 R109 R110 U28
component class CODEC: C95 C96 C97 C98 C99 R112 R113 R116 U31
component class PCB_FEATURE: Logo
channel class TS3USB3031_2-ch_2p3t_Multiplexer: UART_MUX USB_MUX
net class QSPI: PE10 PE11 PE12 PE13 PE14 PE15
net class PC[0..15]: PC0 PC1 PC2 PC3 PC4 PC5 PC6 PC7 PC8 PC9 PC10 PC11 PC12 PC13 PC14
net class PB[0..15]: PB0 PB1 PB2 PB3 PB4 PB5 PB6 PB7 PB8 PB9 PB10 PB11 PB12 PB13 PB15
net class PA[0..15]: PA0 PA1 PA2 PA3 PA4 PA5 PA6 PA7 PA8 PA9 PA10 PA11 PA12 PA13 PA14 PA15
net class GPIO[0..21]: GPIO0 GPIO1 GPIO2 GPIO3 GPIO4 GPIO5 GPIO6 GPIO7 GPIO8 GPIO9 GPIO10 GPIO18 GPIO19 GPIO20 GPIO21
component class USB_MUX: R85 R86
component class +4V2_PS: C49 C50 C51 C52 L2 R77 R78 R79 U15
component class P110: C43 C44 C45 C46 C47 C48 R64 R65 R66 R67 R68 R69 R70 R71 R72 R73 R74 R75 R76 U14
component class P109: C14 C17 C18 C19 C20 C21 C22 C23 C24 C25 C26 C27 C28 C29 C30 C32 D4 D5 FB1 FB2 FB3 Q2 Q3 Q4 R31 R34 R35 R36 R37 R38 R41 R42 R47 R48 R49 R50 TP26 TP27 U6 U7 U8 X2 X3
component class U_ESP32-WROOM32D_Module: Q5 Q6 R48 R51 R53
component class P01: C147 D11 X6
component class P02: C148 D12 X7
component class USB-to-UART_Bridge: C129 C130 C131 C132 C133 R126 R129 R130 U37
component class FiducialMark: FID1 FID2 FID3
component class P105: C67 U22
net class B2_[0..7]: B2_0 B2_1 B2_2 B2_3 B2_4 B2_5 B2_6 B2_7
net class B1_[0..7]: B1_0 B1_1 B1_2 B1_3 B1_4 B1_5 B1_6 B1_7
net class A2_[0..7]: A2_0 A2_1 A2_2 A2_3 A2_4 A2_5 A2_6 A2_7
net class A1_[0..7]: A1_0 A1_1 A1_2 A1_3 A1_4 A1_5 A1_6 A1_7
component class UART_MUX: R31 R34
component class +1V8_VLT1: C57 C58 U19
component class +1V8_VLT2: C55 C56 U18
channel class "TXB0108 Voltage_Level_Translator": +1V8_VLT1 +1V8_VLT2
component class TestPoint: TP1 TP2 TP3 TP4 TP5 TP6 TP7 TP8 TP9 TP10 TP11 TP12 TP13 TP14 TP15 TP16 TP17 TP18 TP19 TP20 TP21 TP22 TP23 TP24 TP25 TP26 TP27 TP28 TP?
component class +1V8_PS: C83 C84 R112 U27
component class "Net Tie": J1 NT1 NT4 NT5 NT6
component class P26: C68 C69 C70 R96 R97 R99 TP28 U23
component class +3V3_PS: C142 C143 C144 C145 C146 R111 R131 R134 R135 U41
differential pair D: +D_P -D_N
differential pair D3_USB_MUX: +D3_USB_MUX_P -D3_USB_MUX_N
differential pair D2_USB_MUX: +D2_USB_MUX_P -D2_USB_MUX_N
differential pair D1_USB_MUX: +D1_USB_MUX_P -D1_USB_MUX_N
differential pair CONN_D: +CONN_D_P -CONN_D_N

## Components (designator, comment, footprint, x,y, rotation, side; value= is the part's Value field where it differs from the comment)
C1 "CAP CER 1UF 16V X5R 0603" C0603 1095,-222.44 r0 top value=1uF (schematic designator C4)
C2 "CAP CER 0.047UF 50V X7R 0402" C0402 1275,-147.44 r90 top (schematic designator C5)
C3 "CAP CER 4.7UF 10V X5R 0603" C0603 1225,-127.44 r270 top (schematic designator C6)
C4 "CAP CER 10UF 25V X7R 1206" C1206 1145,-92.44 r270 top (schematic designator C7)
C5 "CAP CER 10uF X7R 10% 0805" C0805 1350,-472.44 r90 top (schematic designator C8)
C6 "CAP CER 10uF X7R 10% 0805" C0805 1425,-197.44 r180 top (schematic designator C9)
C7 "CAP CER 10uF X7R 10% 0805" C0805 1425,-347.44 r180 top (schematic designator C10)
C8 "CAP CER 10uF X7R 10% 0805" C0805 1425,-272.44 r180 top (schematic designator C11)
C9 "CAP ALUM 68 UF 20% 25 V SMD" WCAP-ASLI_6.3X5.5 200,-97.44 r180 top (schematic designator C16)
C10 "CAP ALUM 68 UF 20% 25 V SMD" WCAP-ASLI_6.3X5.5 575,-97.44 r0 top (schematic designator C17)
C11 "CAP ALUM 68 UF 20% 25 V SMD" WCAP-ASLI_6.3X5.5 200,277.56 r180 top (schematic designator C18)
C12 "CAP CER 10UF 16V X5R 0603" C0603 210,-887.44 r90 top (schematic designator C34)
C13 "CAP CER 0.1UF 16V X7R 0402" C0402 210,-987.44 r270 top (schematic designator C35)
C14 "CAP CER 0.1UF 50V X7R 0402" C0402 3025,762.56 r180 bottom (schematic designator C36)
C15 "CAP CER 0.1UF 50V X7R 0402" C0402 225,977.56 r0 bottom (schematic designator C52)
C16 "CAP CER 0.1UF 50V X7R 0402" C0402 250,427.56 r90 bottom (schematic designator C53)
C17 "CAP CER 0.1UF 50V X7R 0402" C0402 2399.88,206.26 r90 bottom (schematic designator C42)
C18 "CAP CER 2.2UF 6.3V X5R 0402" C0402 2329.88,206.26 r90 bottom (schematic designator C43)
C19 "CAP CER 0.1UF 50V X7R 0402" C0402 3315,285 r0 top (schematic designator C44)
C20 "CAP CER 0.1UF 50V X7R 0402" C0402 2515,0 r90 top (schematic designator C45)
C21 "CAP CER 33PF 50V C0G/NPO 0402" C0402 3315,235 r0 top (schematic designator C46)
C22 "CAP CER 33PF 50V C0G/NPO 0402" C0402 2465,0 r90 top (schematic designator C47)
C23 "CAP CER 10PF 50V C0G/NP0 0402" C0402 3315,185 r0 top (schematic designator C48)
C24 "CAP CER 10PF 50V C0G/NP0 0402" C0402 2415,0 r90 top (schematic designator C49)
C25 "CAP ALUM 100 UF 20% 6.3 V SMD" WCAP-ASLI_5X5.5 825,-547.44 r270 top (schematic designator C50)
C26 "CAP ALUM 100 UF 20% 6.3 V SMD" WCAP-ASLI_5X5.5 875,-272.44 r0 top (schematic designator C51)
C27 "DNP*" C0402 3310,695 r180 top (schematic designator C37)
C28 "DNP*" C0402 3295,120 r270 top (schematic designator C38)
C29 "DNP*" C0402 3310,845 r180 top (schematic designator C39)
C30 "DNP*" C0402 3335,120 r270 top (schematic designator C40)
C31 "C 100pF 50V C0G, NP0 0402" C0402 3335,0 r270 top (schematic designator C41)
C32 "CAP CER 10nF 25V X7R 10% 0402" C0402 2500,827.56 r0 bottom (schematic designator C54)
C33 "CAP CER 0.1UF 50V X7R 0402" C0402 2794.88,471.26 r180 bottom (schematic designator C55)
C34 "CAP CER 0.1UF 50V X7R 0402" C0402 1700,477.56 r180 bottom (schematic designator C19)
C35 "CAP CER 0.1UF 50V X7R 0402" C0402 1700,102.56 r180 bottom (schematic designator C20)
C36 "CAP CER 0.1UF 50V X7R 0402" C0402 1400,-692.44 r180 top (schematic designator C21)
C37 "CAP CER 1UF 6.3V X5R 0402" C0402 1550,402.56 r0 top (schematic designator C22)
C38 "CAP CER 1UF 6.3V X5R 0402" C0402 1550,27.56 r0 top (schematic designator C23)
C39 "CAP CER 1UF 6.3V X5R 0402" C0402 1375,-822.44 r180 top (schematic designator C24)
C40 "DNP*" C0402 1550,442.56 r0 top (schematic designator C25)
C41 "DNP*" C0402 1550,67.56 r0 top (schematic designator C26)
C42 "DNP*" C0402 1375,-922.44 r180 top (schematic designator C27)
C43 "CAP CER 10nF 25V X7R 10% 0402" C0402 1275,-847.44 r0 bottom (schematic designator C1)
C44 "CAP CER 1000PF 50V X7R 0402" C0402 1275,-727.44 r0 bottom (schematic designator C2)
C45 "CAP CER 1UF 6.3V X5R 0402" C0402 1280,-1012.44 r0 bottom (schematic designator C3)
C46 "CAP CER 0.022UF 25V X7R 0402" C0402 1360,-932.44 r180 bottom (schematic designator C4)
C47 "CAP CER 22UF 25V X5R 0805" C0805 1560,-787.44 r0 bottom (schematic designator C5)
C48 "CAP CER 2.2UF 16V X5R 0603" C0603 1555,-717.44 r0 bottom (schematic designator C6)
C49 "CAP CER 10uF X7R 10% 0805" C0805 615,-607.44 r0 top (schematic designator C1)
C50 "CAP CER 0.1UF 50V X7R 0402" C0402 440,-447.44 r270 top (schematic designator C2)
C51 "CAP CER 22UF 10V X5R 0805" C0805 615,-457.44 r180 top (schematic designator C3)
C52 "CAP CER 22UF 10V X5R 0805" C0805 615,-532.44 r180 top (schematic designator C4)
C53 "CAP CER 0.1UF 50V X7R 0402" C0402 2465,-172.44 r270 bottom (schematic designator C1)
C54 "CAP CER 0.1UF 50V X7R 0402" C0402 1475,-232.44 r0 bottom (schematic designator C1)
C55 "CAP CER 0.1UF 50V X7R 0402" C0402 2630,87.56 r270 bottom (schematic designator C28)
C56 "CAP CER 0.1UF 50V X7R 0402" C0402 2635,-122.44 r270 bottom (schematic designator C30)
C57 "CAP CER 0.1UF 50V X7R 0402" C0402 2825,87.56 r270 bottom (schematic designator C28)
C58 "CAP CER 0.1UF 50V X7R 0402" C0402 2830,-122.44 r270 bottom (schematic designator C30)
C59 "CAP CER 2.2UF 6.3V X5R 0402" C0402 700,687.56 r180 top (schematic designator C1)
C60 "CAP CER 0.1UF 50V X7R 0402" C0402 700,727.56 r180 top (schematic designator C2)
C61 "CAP CER 220PF 50V X7R 0402" C0402 275,-397.44 r180 bottom (schematic designator C1)
C62 "CAP CER 4.7UF 35V X7R 0805" C0805 175,152.56 r180 bottom (schematic designator C2)
C63 "CAP CER 220PF 50V X7R 0402" C0402 75,-347.44 r0 bottom (schematic designator C3)
C64 "CAP CER 0.1UF 50V X7R 0402" C0402 575,357.56 r0 bottom (schematic designator C13)
C65 "CAP CER 0.1UF 50V X7R 0402" C0402 575,317.56 r0 bottom (schematic designator C14)
C66 "CAP CER 0.1UF 50V X7R 0402" C0402 575,397.56 r0 bottom (schematic designator C15)
C67 "CAP CER 0.1UF 50V X7R 0402" C0402 2390,-752.44 r90 top (schematic designator C1)
C68 "CAP CER 0.1UF 16V X7R 0402" C0402 2360,-882.44 r0 top (schematic designator C1)
C69 "CAP CER 0.1UF 16V X7R 0402" C0402 2360,-962.44 r0 top (schematic designator C2)
C70 "CAP 11MF 3.3V SURFACE MNT" CAPCP3225X100N 2260,-942.44 r270 top (schematic designator C3)
C71 "CAP CER 0.1UF 50V X7R 0402" C0402 1375,117.56 r180 top (schematic designator C1)
C72 "CAP CER 0.1UF 50V X7R 0402" C0402 1510,197.56 r270 top (schematic designator C2)
C73 "CAP CER 22UF 25V X5R 0805" C0805 665,277.56 r90 top (schematic designator C3)
C74 "CAP CER 0.1UF 50V X7R 0402" C0402 1295,117.56 r0 top (schematic designator C4)
C75 "CAP CER 1800PF 50V X7R 0402" C0402 1450,217.56 r180 top (schematic designator C5)
C76 "CAP CER 1UF 16V X5R 0402" C0402 1440,572.56 r180 top (schematic designator C6)
C77 "CAP CER 22UF 25V X5R 0805" CAPC2012X14N 1190,277.56 r90 top (schematic designator C7)
C78 "CAP CER 22UF 25V X5R 0805" C0805 860,577.56 r90 top (schematic designator C8)
C79 "CAP CER 22UF 25V X5R 0805" C0805 780,577.56 r90 top (schematic designator C9)
C80 "CAP CER 22UF 25V X5R 0805" C0805 700,577.56 r90 top (schematic designator C10)
C81 "CAP CER 1UF 16V X5R 0402" C0402 1550,267.56 r0 bottom (schematic designator C1)
C82 "CAP CER 0.1UF 50V X7R 0402" C0402 1550,227.56 r0 bottom (schematic designator C2)
C83 "CAP CER 2.2UF 6.3V X5R 0402" C0402 1515,777.56 r90 bottom (schematic designator C1)
C84 "CAP CER 2.2UF 6.3V X5R 0402" C0402 1625,777.56 r90 bottom (schematic designator C2)
C85 "CAP CER 0.1UF 50V X7R 0402" C0402 1250,927.56 r90 top (schematic designator C1)
C86 "CAP CER 1UF 6.3V X5R 0402" C0402 1125,712.56 r0 top (schematic designator C2)
C87 "CAP CER 1UF 6.3V X5R 0402" C0402 1125,752.56 r0 top (schematic designator C3)
C88 "CAP CER 0.1UF 50V X7R 0402" C0402 1300,927.56 r270 top (schematic designator C4)
C89 "CAP CER 22UF 25V X5R 0805" C0805 1360,952.56 r90 top (schematic designator C5)
C90 "CAP CER 10uF X7R 10% 0805" C0805 1045,762.56 r270 top (schematic designator C6)
C91 "CGA2B3X7R1H104K050BB" C0402 1175,452.56 r270 top (schematic designator C1)
C92 "CGA2B3X7R1H104K050BB" C0402 1125,672.56 r0 top (schematic designator C2)
C93 "CAP CER 0.1UF 50V X7R 0402" C0402 355,427.56 r270 bottom (schematic designator C1)
C94 "CAP CER 0.1UF 50V X7R 0402" C0402 420,427.56 r90 bottom (schematic designator C2)
C95 "CAP CER 10nF 25V X7R 10% 0402" C0402 1045,-762.44 r180 bottom (schematic designator C28)
C96 "CAP CER 10PF 50V C0G/NP0 0402" C0402 1005,-682.44 r270 bottom (schematic designator C29)
C97 "C 100pF 50V C0G, NP0 0402" CAP_0402 885,-682.44 r270 bottom (schematic designator C30)
C98 "CAP CER 10nF 25V X7R 10% 0402" C0402 845,-682.44 r270 bottom (schematic designator C31)
C99 "CAP CER 0.1UF 50V X7R 0402" C0402 925,-682.44 r270 bottom (schematic designator C32)
C100 "CAP CER 1UF 16V X5R 0402" C0402 3335,-597.44 r180 top (schematic designator C1)
C101 "CAP CER 10UF 16V X5R 0603" C0603 3250,-747.44 r0 bottom (schematic designator C2)
C102 "CAP CER 10UF 16V X5R 0603" C0603 3250,-682.44 r0 bottom (schematic designator C3)
C103 "CAP CER 0.1UF 16V X7R 0402" C0402 3335,-717.44 r180 top (schematic designator C4)
C104 "CAP CER 0.1UF 50V X7R 0402" C0402 811.81,978.35 r180 bottom (schematic designator C1)
C105 "CAP CER 0.1UF 50V X7R 0402" C0402 510,157.56 r270 bottom (schematic designator C12)
C106 "CAP CER 0.1UF 50V X7R 0402" C0402 575,77.56 r0 bottom (schematic designator C2)
C107 "CAP CER 10uF X7R 10% 0805" C0805 1300,577.56 r0 bottom (schematic designator C7)
C108 "CAP CER 0.1UF 50V X7R 0402" C0402 575,207.56 r0 bottom (schematic designator C3)
C109 "CAP CER 0.1UF 50V X7R 0402" C0402 1325,277.56 r0 bottom (schematic designator C8)
C110 "CAP CER 0.1UF 50V X7R 0402" C0402 575,482.56 r0 bottom (schematic designator C4)
C111 "CAP CER 0.1UF 50V X7R 0402" C0402 1325,22.56 r0 bottom (schematic designator C9)
C112 "CAP CER 0.1UF 50V X7R 0402" C0402 925,627.56 r270 bottom (schematic designator C5)
C113 "CAP CER 0.1UF 50V X7R 0402" C0402 975,-122.44 r270 bottom (schematic designator C10)
C114 "CAP CER 0.1UF 50V X7R 0402" C0402 1195,627.56 r90 bottom (schematic designator C6)
C115 "CAP CER 0.1UF 50V X7R 0402" C0402 705,-122.44 r270 bottom (schematic designator C11)
C116 "CAP CER 0.1UF 50V X7R 0402" C0402 1150,-92.44 r0 bottom (schematic designator C12)
C117 "CAP CER 1UF 16V X5R 0402" C0402 1150.31,-132.44 r0 bottom (schematic designator C13)
C118 "CAP CER 0.1UF 50V X7R 0402" C0402 1230,-92.44 r180 bottom (schematic designator C14)
C119 "CAP CER 1UF 16V X5R 0402" C0402 1230,-132.44 r180 bottom (schematic designator C15)
C120 "CAP CER 0.1UF 50V X7R 0402" C0402 215,227.56 r180 bottom (schematic designator C1)
C121 "CAP CER 2.2UF 35V X5R 0603" C0603 1750,867.56 r270 bottom (schematic designator C1)
C122 "CAP CER 0.1UF 16V X7R 0402" C0402 1540,1002.56 r180 bottom (schematic designator C2)
C123 "CAP CER 2.2UF 35V X5R 0603" C0603 1470,912.56 r90 bottom (schematic designator C3)
C124 "CAP CER 10UF 16V X5R 0603" CAPC1608X08N_0603 1025,-497.44 r0 bottom (schematic designator C1)
C125 "CAP CER 10UF 16V X5R 0603" CAPC1608X08N_0603 1025,-447.44 r0 bottom (schematic designator C2)
C126 "CAP CER 100PF 50V C0G/NPO 0402" C0402 835,-582.44 r180 bottom (schematic designator C3)
C127 "CAP CER 10UF 16V X5R 0603" CAPC1608X08N_0603 1025,-547.44 r0 bottom (schematic designator C4)
C128 "CAP CER 10UF 16V X5R 0603" CAPC1608X08N_0603 1025,-597.44 r0 bottom (schematic designator C5)
C129 "CAP CER 1UF 16V X5R 0402" C0402 2450,-612.44 r0 top (schematic designator C1)
C130 "CAP CER 0.1UF 50V X7R 0402" C0402 2565,-472.44 r270 top (schematic designator C2)
C131 "CAP CER 1UF 16V X5R 0402" C0402 2450,-472.44 r270 top (schematic designator C3)
C132 "CAP CER 1UF 16V X5R 0402" C0402 2490,-472.44 r270 top (schematic designator C4)
C133 "CAP CER 0.1UF 50V X7R 0402" C0402 2530,-472.44 r270 top (schematic designator C5)
C134 "CAP CER 10UF 16V X5R 0603" C0603 175,-787.44 r180 top (schematic designator C1)
C135 "CAP CER 0.1UF 50V X7R 0402" C0402 50,-372.44 r270 top (schematic designator C2)
C136 "CAP CER 10UF 16V X7R 0805" C0805 125,-497.44 r0 top (schematic designator C3)
C137 "CAP CER 10UF 16V X5R 0603" C0603 325,-607.44 r90 top (schematic designator C4)
C138 "CAP CER 10UF 16V X5R 0603" C0603 300,-377.44 r90 top (schematic designator C5)
C139 "CAP CER 0.1UF 50V X7R 0402" C0402 75,-882.44 r0 bottom (schematic designator C33)
C140 "CAP CER 0.1UF 50V X7R 0402" C0402 375,-282.44 r90 bottom (schematic designator C2)
C141 "CAP CER 1UF 16V X5R 0402" C0402 415,-282.44 r90 bottom (schematic designator C1)
C142 "CAP CER 10UF 16V X5R 0603" CAPC1608X08N_0603 900,977.56 r90 top (schematic designator C1)
C143 "CAP CER 10UF 16V X5R 0603" CAPC1608X08N_0603 950,977.56 r90 top (schematic designator C2)
C144 "CAP CER 100PF 50V C0G/NPO 0402" C0402 830,787.56 r270 top (schematic designator C3)
C145 "CAP CER 10UF 16V X5R 0603" CAPC1608X08N_0603 850,977.56 r90 top (schematic designator C4)
C146 "CAP CER 10UF 16V X5R 0603" CAPC1608X08N_0603 800,977.56 r90 top (schematic designator C5)
C147 "CAP CER 0.1UF 50V X7R 0402" C0402 3082.13,977.56 r90 top (schematic designator C1)
C148 "CAP CER 0.1UF 50V X7R 0402" C0402 2590,977.56 r90 top (schematic designator C1)
D1 "\"CHG\"" LED_0603 50,177.56 r90 bottom (schematic designator D2)
D2 "ESDA7P120-1U1M" ST_QFN_1610 1475,-447.44 r270 top (schematic designator D3)
D3 "NSR0140P2T5G" SODFL100X40-2N 650,-672.44 r0 top (schematic designator D4)
D4 "MM3Z5V1C" SOD-323F 2900,737.56 r180 bottom (schematic designator D5)
D5 "ESDA7P120-1U1M" ST_QFN_1610 365,-337.44 r270 top (schematic designator D6)
D6 "ESDA25P35-1U1M" ST_QFN_1610 375,-12.44 r90 bottom (schematic designator D1)
D7 "PMEG4050EP,115" SOD-128 1025,577.56 r0 top (schematic designator D1)
D8 "Zener Diode 6.2V 2.5W ±5% Surface Mount SOD-123FL" SOD-123FL 1090,877.56 r180 top (schematic designator D1)
D9 "STPS120MF" SODFL375X95-2N 290,-492.44 r180 top (schematic designator D1)
D10 "MMSZ5226B-7-F" SOD-123 400,-747.44 r0 top (schematic designator D2)
D11 "SMF05CT1G" SOT363_SOP65P210X265-6N 2930,942.56 r0 top (schematic designator D1)
D12 "SMF05CT1G" SOT363_SOP65P210X265-6N 2440,942.56 r0 top (schematic designator D1)
ESP32_MOD "ESP32-C3-MINI-1-H4" MODULE_ESP32-C3-MINI-1 3025,-622.44 r180 top
FB1 "Not Fitted in BG95-M3_Global Variant" L0603 430,-347.44 r270 top (schematic designator FB2)
FB2 "MPZ1608S300ATAH0" L0603 3300,375 r90 top (schematic designator FB3)
FB3 "MPZ1608S300ATAH0" L0603 2350,-20 r270 top (schematic designator FB4)
FB4 "FERRITE BEAD 1 KOHM 0402 1LN" L0402 1360,572.56 r0 top (schematic designator FB1)
FB5 "FERRITE BEAD 1 KOHM 0402 1LN" L0402 1230,-172.44 r0 bottom (schematic designator FB1)
FB6 "FERRITE BEAD 470 OHM 0603 1LN" L0603 40,-647.44 r270 top (schematic designator FB1)
FB7 "FERRITE BEAD 1 KOHM 0402 1LN" L_0402 75,-922.44 r0 bottom (schematic designator FB1)
FID1 "N/A" FIDUCIAL 375,152.56 r0 top
FID2 "N/A" FIDUCIAL 3225,-272.44 r90 top
FID3 "N/A" FIDUCIAL 710,977.56 r90 top
G1 "Logo_ESD" Logo_ESD 3765,634.88 r90 bottom
Ground&PowerPlanes_1 "Number & Stacking Stripe" SIGNAL-1 4726.26,-982.52 r0 top
Ground&PowerPlanes_2 "Number & Stacking Stripe" PLANE-2 4726.26,-982.52 r0 top
Ground&PowerPlanes_3 "Number & Stacking Stripe" PLANE-3 4726.26,-982.52 r0 top
Ground&PowerPlanes_4 "Number & Stacking Stripe" SIGNAL-4 4726.26,-982.52 r0 top
Ground&PowerPlanes_5 "Number & Stacking Stripe" SIGNAL-5 4726.26,-982.52 r0 top
Ground&PowerPlanes_6 "Number & Stacking Stripe" SIGNAL-6 4726.26,-982.52 r0 bottom
J1 "Net Tie" "Net Tie 6x30mil" 1315,535.56 r90 top net-tie
L1 "FIXED IND 1UH 5A 24 MOHM SMD" IND_IHLP-1212B00 1375,-87.44 r0 top
L2 "FIXED IND 1UH 2.4A 54 MOHM MAX" IND_WE_LQSH_3012 480,-572.44 r90 top (schematic designator L1)
L3 "FIXED IND COUIPLED 2.2UH 3.2A 22 MOHM SMD" IND_MSD1048H 925,277.56 r180 top (schematic designator L1)
L4 "FIXED IND COUIPLED 6.8UH 1.2A 160 mOHM SMD" IND_LPD5030 175,-647.44 r180 top (schematic designator L1)
Logo "Logo ACME_CPU" LOGO_ACME_CPU 3805,94.88 r90 bottom
NT1 "Net Tie" "Net Tie 8x30mil" 1160,-452.44 r270 top net-tie (schematic designator NT2)
NT2 "Net Tie" "NET TIE 6X30MIL" 1289,56.56 r0 bottom net-tie (schematic designator NT3)
NT3 "Net Tie" "NET TIE 6X30MIL" 1289,68.56 r0 bottom net-tie (schematic designator NT4)
NT4 "Net Tie" "Net Tie 6x30mil" 1500,112.56 r0 bottom net-tie (schematic designator NT1)
NT5 "Net Tie" "NET TIE 6X30MIL" 20,-947.44 r90 top net-tie
NT6 "Net Tie" "Net Tie 6x30mil" 870,-982.44 r90 bottom net-tie
NT7 "Net Tie" "Net Tie 6x30mil" 395,257.56 r270 bottom net-tie
NT8 "Net Tie" "Net Tie 6x30mil" 330,257.56 r270 bottom net-tie
P10 "USB" MOLEX_2012670005 156.3,-97.44 r90 bottom
P16 "DC Motor" CONN_JST_S4B-ZR-SM4A-TF(LF)(SN) 1675,802.56 r90 top
P17 "BLDC Motor" CONN_JST_S5B-ZR-SM4A-TF(LF)(SN) 1560,802.56 r90 top
P18 "BATT" CONN_JST_S2B-ZR-SM4A-TF(LF)(SN) 1675,-372.44 r90 top
P19 "THERMISTOR NTC 10KOHM 3380K 0603" R0603 1240,-522.44 r180 top
P20 "S201" CONN_0545500571 1675,402.56 r90 top
P25 "Stepper Motor" CONN_JST_SM4B-NSHSS-TB(LF)(SN) 1650,-747.44 r90 top
P28 "S202" CONN_0545500571 1675,27.56 r90 top
Q1 "DMN32D2LV-7" SON_400UV-7_DIO 1725,627.56 r180 bottom (schematic designator Q3)
Q2 "DTC143ZET1G" SOT-416FL_ONS 2550,752.56 r90 bottom (schematic designator Q6)
Q3 "DTC143ZET1G" SOT-416FL_ONS 2450,752.56 r90 bottom (schematic designator Q7)
Q4 "DMN32D2LV-7" SON_400UV-7_DIO 2794.88,396.26 r0 bottom (schematic designator Q8)
Q5 "BC847CW,115" SOT-323 3350,-372.44 r270 top (schematic designator Q4)
Q6 "BC847CW,115" SOT-323 2700,-372.44 r90 top (schematic designator Q5)
Q7 "DMN32D2LV-7" SON_400UV-7_DIO 175,-372.44 r0 bottom (schematic designator Q1)
Q8 "EM6M2T2R" SON_400UV-7_DIO 500,202.56 r0 top (schematic designator Q2)
Q9 "BC847CW,115" SOT-323 1275,377.56 r270 top (schematic designator Q1)
R1 "RC0402FR-071KL" R0402 50,282.56 r90 bottom value=22k (schematic designator R12)
R2 "RES SMD 10K OHM 1% 1/16W 0402" R0402 1195,-452.44 r270 top (schematic designator R13)
R3 "RES SMD 31.6K OHM 1% 1/16W 0402" R0402 1260,-472.44 r0 top (schematic designator R14)
R4 "RES SMD 5.36K OHM 1% 1/16W 0402" R0402 1260,-432.44 r0 top (schematic designator R15)
R5 "RES SMD 4.75K OHM 1% 1/16W 0402" R0402 1700,327.56 r180 bottom (schematic designator R16)
R6 "RES SMD 4.75K OHM 1% 1/16W 0402" R0402 1765,362.56 r270 bottom (schematic designator R17)
R7 "RES SMD 4.75K OHM 1% 1/16W 0402" R0402 1700,-47.44 r180 bottom (schematic designator R18)
R8 "RES SMD 4.75K OHM 1% 1/16W 0402" R0402 1765,-12.44 r270 bottom (schematic designator R19)
R9 "RES SMD 2.7K OHM 1% 1/16W 0402" R0402 1700,222.56 r0 bottom (schematic designator R20)
R10 "RES SMD 2.7K OHM 1% 1/16W 0402" R0402 1700,182.56 r0 bottom (schematic designator R21)
R11 "RES SMD 100K OHM 1% 1/16W 0402" R0402 1550,477.56 r180 bottom (schematic designator R22)
R12 "RES SMD 100K OHM 1% 1/16W 0402" R0402 1550,437.56 r180 bottom (schematic designator R23)
R13 "RES SMD 100K OHM 1% 1/16W 0402" R0402 1550,357.56 r180 bottom (schematic designator R24)
R14 "RES SMD 100K OHM 1% 1/16W 0402" R0402 2400,-190 r0 top (schematic designator R25)
R15 "RES SMD 100K OHM 1% 1/16W 0402" R0402 2400,-150 r0 top (schematic designator R26)
R16 "RES SMD 100K OHM 1% 1/16W 0402" R0402 1700,142.56 r180 bottom (schematic designator R27)
R17 "RES SMD 100K OHM 1% 1/16W 0402" R0402 2630,977.56 r270 top (schematic designator R28)
R18 "RES SMD 100K OHM 1% 1/16W 0402" R0402 550,277.56 r0 top (schematic designator R29)
R19 "RES SMD 100K OHM 1% 1/16W 0402" R0402 1550.31,362.56 r180 top (schematic designator R30)
R20 "RES SMD 100K OHM 1% 1/16W 0402" R0402 1550,-12.44 r180 top (schematic designator R31)
R21 "RES SMD 100K OHM 1% 1/16W 0402" R0402 1485,-592.44 r0 top (schematic designator R32)
R22 "RES SMD 0 OHM JUMPER 1/16W 0402" R0402 1400,142.56 r180 bottom (schematic designator R33)
R23 "RES SMD 0 OHM JUMPER 1/16W 0402" R0402 1400,97.56 r180 bottom (schematic designator R34)
R24 "RES SMD 10K OHM 1% 1/16W 0402" R0402 1625,647.56 r180 bottom (schematic designator R43)
R25 "RES SMD 10K OHM 1% 1/16W 0402" R0402 1625,607.56 r180 bottom (schematic designator R44)
R26 "RES SMD 0 OHM JUMPER 1/16W 0402" R0402 1520,647.56 r180 bottom (schematic designator R45)
R27 "RES SMD 0 OHM JUMPER 1/16W 0402" R0402 1520,607.56 r180 bottom (schematic designator R46)
R28 "DNP*" R0402 1625,567.56 r180 bottom (schematic designator R47)
R29 "RES SMD 10K OHM 1% 1/16W 0402" R0402 1520,687.56 r180 bottom (schematic designator R48)
R30 "RES SMD 10K OHM 1% 1/16W 0402" R0402 1520,567.56 r180 bottom (schematic designator R49)
R31 "DNP*" R0402 1625,687.56 r0 bottom (schematic designator R50)
R32 "RES SMD 1K OHM 1% 1/16W 0402" R0402 1550,397.56 r0 bottom (schematic designator R62)
R33 "RES SMD 10K OHM 1% 1/16W 0402" R0402 2505,-172.44 r90 bottom (schematic designator R70)
R34 "RES SMD 10K OHM 1% 1/16W 0402" R0402 2545,-172.44 r90 bottom (schematic designator R71)
R35 "RES SMD 0 OHM JUMPER 1/16W 0402" R0402 2895,792.56 r0 bottom (schematic designator R72)
R36 "DNP*" R0402 2895,832.56 r0 bottom (schematic designator R73)
R37 "DNP*" R0402 2895,872.56 r0 bottom (schematic designator R74)
R38 "RES SMD 10K OHM 1% 1/16W 0402" R0402 3025,722.56 r180 bottom (schematic designator R75)
R39 "RES SMD 15K OHM 1% 1/16W 0402" R0402 250,342.56 r90 bottom (schematic designator R78)
R40 "RES SMD 0 OHM JUMPER 1/16W 0402" R0402 210,342.56 r90 bottom (schematic designator R79)
R41 "RES SMD 0 OHM JUMPER 1/16W 0402" R0402 170,342.56 r90 bottom (schematic designator R80)
R42 "RES SMD 0 OHM JUMPER 1/16W 0402" R0402 130,342.56 r90 bottom (schematic designator R81)
R43 "RES SMD 0 OHM JUMPER 1/16W 0402" R0402 3290,770 r90 top (schematic designator R76)
R44 "RES SMD 0 OHM JUMPER 1/16W 0402" R0402 3315,60 r0 top (schematic designator R77)
R45 "RES SMD 5.1K OHM 1% 1/16W 0402" R0402 2329.88,296.26 r90 bottom (schematic designator R82)
R46 "RES SMD 100K OHM 1% 1/16W 0402" R0402 2329.88,376.26 r270 bottom (schematic designator R83)
R47 "RES SMD 10K OHM 1% 1/16W 0402" R0402 2694.88,376.26 r180 bottom (schematic designator R84)
R48 "RES SMD 100K OHM 1% 1/16W 0402" R0402 2694.88,416.26 r0 bottom (schematic designator R85)
R49 "RES SMD 10K OHM 1% 1/16W 0402" R0402 2894.88,416.26 r0 bottom (schematic designator R86)
R50 "RES SMD 100K OHM 1% 1/16W 0402" R0402 2894.88,376.26 r180 bottom (schematic designator R87)
R51 "RES SMD 0 OHM JUMPER 1/16W 0402" R0402 3335,-477.44 r0 top (schematic designator R63)
R52 "RES SMD 10K OHM 1% 1/16W 0402" R0402 2725,-472.44 r270 top (schematic designator R64)
R53 "RES SMD 10K OHM 1% 1/16W 0402" R0402 2675,-472.44 r90 top (schematic designator R65)
R54 "RES SMD 100K OHM 1% 1/16W 0402" R0402 3335,-677.44 r180 top (schematic designator R66)
R55 "RES SMD 100K OHM 1% 1/16W 0402" R0402 3335,-637.44 r180 top (schematic designator R67)
R56 "RES SMD 100K OHM 1% 1/16W 0402" R0402 2900,-347.44 r270 top (schematic designator R68)
R57 "RES SMD 100K OHM 1% 1/16W 0402" R0402 3090,-347.44 r270 top (schematic designator R69)
R58 "RES SMD 0 OHM JUMPER 1/16W 0402" R0402 1765,442.56 r270 bottom (schematic designator R51)
R59 "RES SMD 0 OHM JUMPER 1/16W 0402" R0402 1765,67.56 r270 bottom (schematic designator R52)
R60 "RES SMD 0 OHM JUMPER 1/16W 0402" R0402 1485,-632.44 r180 top (schematic designator R53)
R61 "DNP*" R0402 1550,482.56 r180 top (schematic designator R54)
R62 "DNP*" R0402 1550,107.56 r180 top (schematic designator R55)
R63 "DNP*" R0402 1375,-882.44 r0 top (schematic designator R56)
R64 "RES SMD 68.1K OHM 1% 1/16W 0402" R0402 1380,-992.44 r90 bottom (schematic designator R1)
R65 "RES SMD 18.2K OHM 1% 1/16W 0402" R0402 1275,-767.44 r180 bottom (schematic designator R2)
R66 "RES SMD 18.2K OHM 1% 1/16W 0402" R0402 1275,-807.44 r180 bottom (schematic designator R3)
R67 "RES SMD 360KOHM 1% 1/16W 0402" R0402 1340,-992.44 r90 bottom (schematic designator R4)
R68 "RES SMD 10K OHM 1% 1/16W 0402" R0402 1280,-972.44 r0 bottom (schematic designator R5)
R69 "RES SMD 1K OHM 1% 1/16W 0402" R0402 1340,-872.44 r90 bottom (schematic designator R6)
R70 "RES SMD 47K OHM 1% 1/16W 0402" R0402 1380,-872.44 r90 bottom (schematic designator R7)
R71 "RES SMD 10K OHM 1% 1/16W 0402" R0402 1345,-607.44 r270 bottom (schematic designator R8)
R72 "RES SMD 10K OHM 1% 1/16W 0402" R0402 1385,-607.44 r270 bottom (schematic designator R9)
R73 "RES SMD 10K OHM 1% 1/16W 0402" R0402 1275,-647.44 r0 bottom (schematic designator R10)
R74 "RES SMD 10K OHM 1% 1/16W 0402" R0402 1275,-687.44 r0 bottom (schematic designator R11)
R75 "RES SMD 2.2 OHM 5% 1W 2512" R2512 1565,-917.44 r180 bottom (schematic designator R12)
R76 "RES SMD 2.2 OHM 5% 1W 2512" R2512 1570,-577.44 r180 bottom (schematic designator R13)
R77 "RES SMD 100K OHM 1% 1/16W 0402" R0402 485,-347.44 r270 top (schematic designator R1)
R78 "RES SMD 100K OHM 1% 1/16W 0402" R0402 525,-347.44 r270 top (schematic designator R2)
R79 "RES SMD 536K OHM 1% 1/16W 0402" R0402 565,-347.44 r90 top (schematic designator R3)
R80 "RES SMD 100K OHM 1% 1/16W 0402" R0402 75,-397.44 r0 bottom (schematic designator R3)
R81 "RES SMD 100K OHM 1% 1/16W 0402" R0402 275,-347.44 r180 bottom (schematic designator R4)
R82 "DNP*" R0402 1110,-402.44 r180 top (schematic designator R5)
R83 "RES SMD 10K OHM 1% 1/16W 0402" R0402 1030,-402.44 r180 top (schematic designator R6)
R84 "RES SMD 0 OHM JUMPER 1/16W 0402" R0402 1070,-322.44 r0 top (schematic designator R7)
R85 "DNP*" R0402 1110,-362.44 r180 top (schematic designator R8)
R86 "RES SMD 10K OHM 1% 1/16W 0402" R0402 1030,-362.44 r180 top (schematic designator R9)
R87 "RES SMD 10K OHM 1% 1/16W 0402" R0402 1475,-192.44 r180 bottom (schematic designator R10)
R88 "RES SMD 10K OHM 1% 1/16W 0402" R0402 1475,-152.44 r180 bottom (schematic designator R11)
R89 "RES SMD 390K OHM 1% 1/16W 0402" R0402 470,357.56 r0 top (schematic designator R35)
R90 "RES SMD 390K OHM 1% 1/16W 0402" R0402 470,397.56 r0 top (schematic designator R36)
R91 "RES SMD 100K OHM 1% 1/16W 0402" R0402 570,202.56 r270 top (schematic designator R37)
R92 "RES SMD 75K OHM 1% 1/16W 0402" R0402 550,357.56 r180 top (schematic designator R38)
R93 "RES SMD 75K OHM 1% 1/16W 0402" R0402 550,397.56 r180 top (schematic designator R39)
R94 "RES SMD 100K OHM 1% 1/16W 0402" R0402 470,277.56 r180 top (schematic designator R40)
R95 "RES SMD 27K OHM 1% 1/16W 0402" R0402 470,317.56 r0 top (schematic designator R41)
R96 "RES SMD 75K OHM 1% 1/16W 0402" R0402 550,317.56 r180 top (schematic designator R42)
R97 "RES SMD 10K OHM 1% 1/16W 0402" R0402 2530,-977.44 r90 top (schematic designator R1)
R98 "RES SMD 402 OHM 1% 1/16W 0402" R0402 2360,-922.44 r180 top (schematic designator R2)
R99 "RES SMD 10K OHM 1% 1/16W 0402" R0402 2360,-1002.44 r0 top (schematic designator R3)
R100 "RES SMD 54.9K OHM 1% 1/16W 0402" R0402 1365,337.56 r180 top (schematic designator R1)
R101 "RES SMD 1.2K OHM 1% 1/16W 0402" R0402 1450,177.56 r180 top (schematic designator R2)
R102 "DNP*" R0402 1365,377.56 r0 top (schematic designator R3)
R103 "RES SMD 10K OHM 1% 1/16W 0402" R0402 1450,257.56 r0 top (schematic designator R4)
R104 "RES SMD 2.7K OHM 1% 1/16W 0402" R0402 1450,377.56 r0 top (schematic designator R5)
R105 "RES SMD 44.2K OHM 1% 1/16W 0402" R0402 1450,297.56 r180 top (schematic designator R6)
R106 "RES SMD 11K OHM 1% 1/16W 0402" R0402 1450,337.56 r180 top (schematic designator R7)
R107 "DNP*" R0402 1195,582.56 r90 top (schematic designator R2)
R108 "DNP*" R0402 1235,582.56 r90 top (schematic designator R3)
R109 "RES SMD 4.75K OHM 1% 1/16W 0402" R0402 1275,582.56 r90 top (schematic designator R4)
R110 "RES SMD 39 OHM 1% 1/4W 1206" R1206 1135,977.56 r180 top (schematic designator R5)
R111 "RES SMD 0 OHM JUMPER 1/16W 0402" R0402 950,877.56 r90 top (schematic designator R1)
R112 "RES SMD 0 OHM JUMPER 1/16W 0402" R0402 1475,827.56 r90 bottom (schematic designator R2)
R113 "RES SMD 100 OHM 1% 1/16W 0402" 0402R 1045,-842.44 r180 bottom (schematic designator R57)
R114 "RES SMD 63.4K OHM 1% 1/16W 0402" R_0402 965,-682.13 r90 bottom (schematic designator R58)
R115 "RES SMD 100K OHM 1% 1/16W 0402" 0402R 1045,-802.44 r0 bottom (schematic designator R59)
R116 "RES SMD 100K OHM 1% 1/16W 0402" 0402R 845,-962.44 r270 bottom (schematic designator R60)
R117 "RES SMD 100 OHM 1% 1/16W 0402" R0402 3335,-517.44 r0 top (schematic designator R1)
R118 "RES SMD 10K OHM 1% 1/16W 0402" R0402 3335,-557.44 r180 top (schematic designator R2)
R119 "RES SMD 10K OHM 1% 1/16W 0402" R0402 811.81,828.74 r0 bottom (schematic designator R1)
R120 "RES SMD 10K OHM 1% 1/16W 0402" R0402 811.81,927.17 r0 bottom (schematic designator R2)
R121 "RES SMD 10K OHM 1% 1/16W 0402" R0402 1260.63,875.98 r180 bottom (schematic designator R3)
R122 "RES SMD 100 OHM 1% 1/16W 0402" R0402 215,267.56 r0 bottom (schematic designator R1)
R123 "RES SMD 10K OHM 1% 1/16W 0402" R0402 1750,967.56 r90 bottom (schematic designator R1)
R124 "RES SMD 100 OHM 1% 1/2W 0805" R0805 1540,912.56 r270 bottom (schematic designator R2)
R125 "RES SMD 910K OHM 1% 1/16W 0402" R_0402 835,-462.44 r180 bottom (schematic designator R1)
R126 "RES SMD 390K OHM 1% 1/16W 0402" R0402 835,-542.44 r180 bottom (schematic designator R2)
R127 "RES SMD 88.7K OHM 1% 1/16W 0402" 0402R 835,-502.44 r180 bottom (schematic designator R3)
R128 "RES SMD 23.7K OHM 1% 1/16W 0402" R0402 2450,-532.44 r180 top (schematic designator R1)
R129 "RES SMD 47K OHM 1% 1/16W 0402" R0402 2450,-572.44 r180 top (schematic designator R2)
R130 "RES SMD 1K OHM 1% 1/16W 0402" R0402 2450,-647.44 r0 top (schematic designator R3)
R131 "RES SMD 2.26 OHM 1% 1/10W 0603" R0603 250,-377.44 r270 top (schematic designator R1)
R132 "RES SMD 100 OHM 1% 1/16W 0402" 0402R 75,-842.44 r0 bottom (schematic designator R61)
R133 "RES SMD 910K OHM 1% 1/16W 0402" R_0402 950,787.56 r270 top (schematic designator R1)
R134 "RES SMD 390K OHM 1% 1/16W 0402" R0402 870,787.56 r270 top (schematic designator R2)
R135 "RES SMD 88.7K OHM 1% 1/16W 0402" 0402R 910,787.56 r270 top (schematic designator R3)
TP1 "Test Point Pad" Testpoint 3664.72,-1712.69 r90 bottom (schematic designator TP3)
TP2 "Test Point Pad" Testpoint 3781,-1853.17 r90 bottom (schematic designator TP4)
TP3 "Test Point Pad" Testpoint 3625.96,-1572.22 r90 bottom (schematic designator TP5)
TP4 "Test Point Pad" Testpoint 3936.04,-1516.03 r90 bottom (schematic designator TP6)
TP5 "Test Point Pad" Testpoint 3703.48,-1459.84 r90 bottom (schematic designator TP7)
TP6 "Test Point Pad" TESTPOINT 3997.36,-1410.54 r90 bottom (schematic designator TP8)
TP7 "Test Point Pad" TESTPOINT 2200,177.56 r90 bottom (schematic designator TP9)
TP8 "Test Point Pad" TESTPOINT 2275,-622.44 r90 bottom (schematic designator TP10)
TP9 "Test Point Pad" TESTPOINT 2200,-622.44 r90 bottom (schematic designator TP11)
TP10 "Test Point Pad" TESTPOINT 4043.41,-1607.2 r90 bottom (schematic designator TP12)
TP11 "Test Point Pad" TESTPOINT 4159.68,-1487.98 r90 bottom (schematic designator TP13)
TP12 "Test Point Pad" TESTPOINT 3772.09,-1663.39 r90 bottom (schematic designator TP14)
TP13 "Test Point Pad" TESTPOINT 3692.28,-1831.96 r90 bottom (schematic designator TP15)
TP14 "Test Point Pad" TESTPOINT 3987.36,-1888.16 r90 bottom (schematic designator TP16)
TP15 "Test Point Pad" TESTPOINT 3609.76,-1438.63 r90 bottom (schematic designator TP17)
TP16 "Test Point Pad" TESTPOINT 4203.68,-1635.3 r90 bottom (schematic designator TP18)
TP17 "Test Point Pad" TESTPOINT 4469.76,-1743.84 r90 bottom (schematic designator TP19)
TP18 "Test Point Pad" TESTPOINT 3888.37,-1775.77 r90 bottom (schematic designator TP20)
TP19 "Test Point Pad" TESTPOINT 4307.44,-1691.49 r90 bottom (schematic designator TP21)
TP20 "Test Point Pad" TESTPOINT 4049.88,-1765.03 r90 bottom (schematic designator TP22)
TP21 "Test Point Pad" TESTPOINT 3849.61,-1944.35 r90 bottom (schematic designator TP23)
TP22 "Test Point Pad" TESTPOINT 3731.04,-1382.44 r90 bottom (schematic designator TP24)
TP23 "Test Point Pad" TESTPOINT 4389.96,-1916.25 r90 bottom (schematic designator TP25)
TP24 "Test Point Pad" TESTPOINT 4353.48,-1551.01 r90 bottom (schematic designator TP26)
TP25 "Test Point Pad" TESTPOINT 4214.92,-1860.06 r90 bottom (schematic designator TP27)
TP26 "Test Point Pad" TESTPOINT 3135,812.56 r0 bottom (schematic designator TP1)
TP27 "Test Point Pad" TESTPOINT 3135,887.56 r0 bottom (schematic designator TP2)
TP28 "Test Point Pad" TESTPOINT 2225,-497.44 r0 bottom (schematic designator TP1)
U1 "BQ25611DRTWT" RTW0024 1250,-297.44 r0 top (schematic designator U2)
U2 "NUF4401MNT1G" DFN8 750,-747.44 r90 top (schematic designator U9)
U3 "NUF4401MNT1G" DFN8 650,-747.44 r90 top (schematic designator U10)
U4 "NUF4401MNT1G" DFN8 550,-747.44 r90 top (schematic designator U11)
U6 "BG95-M1" BG95 2775,450 r270 top value=BG95 (schematic designator U12)
U7 "USBLC6-2SC6" SOT-23-6 3025,852.56 r0 bottom (schematic designator U13)
U8 "ECMF02-2AMX6" QFN-6L 2775,852.56 r180 bottom (schematic designator U14)
U9 "TPD3F303DPVR" DPV8_1P7X0P4 175,427.56 r270 bottom (schematic designator U15)